# Altium PCB ECS.PcbDoc (part 1 of 2)
Units mil, origin at the board's own origin, x right, y up, seen from the top; angles counter-clockwise.
Board outline 7693.03 x 5708.02 mil, 4 copper layers (Top Layer, Groud, Power, Bottom Layer); 237 components, 184 nets, 882 pads, 605 vias.
Unrouted connection lines stored in the file: 304.
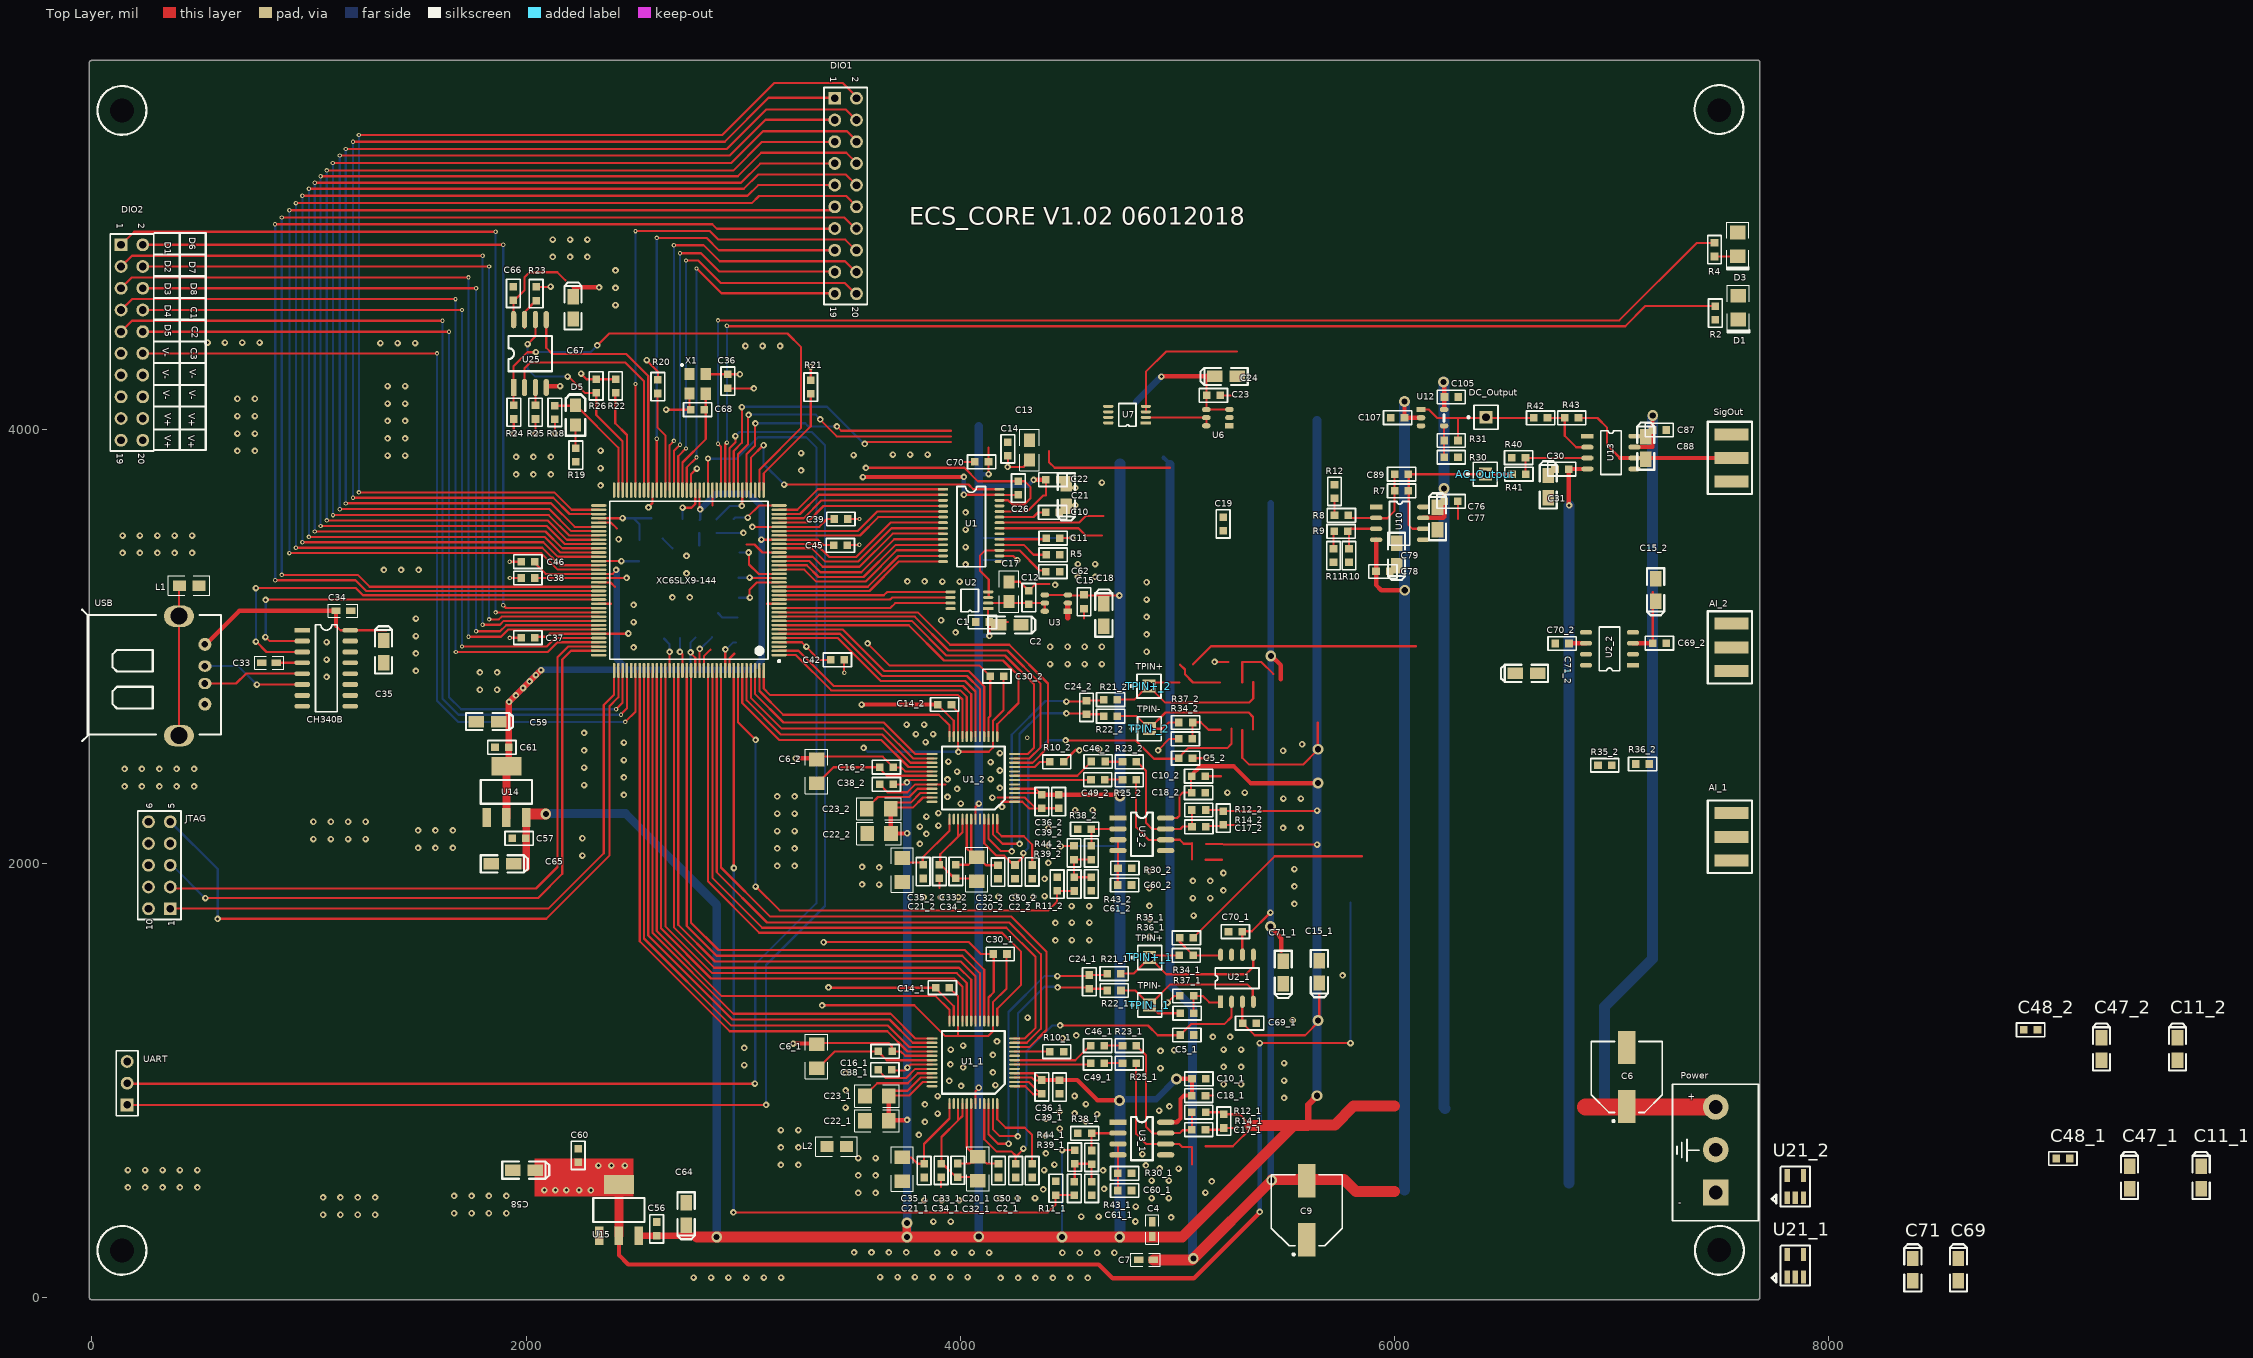
[diagram p0: Top Layer view]
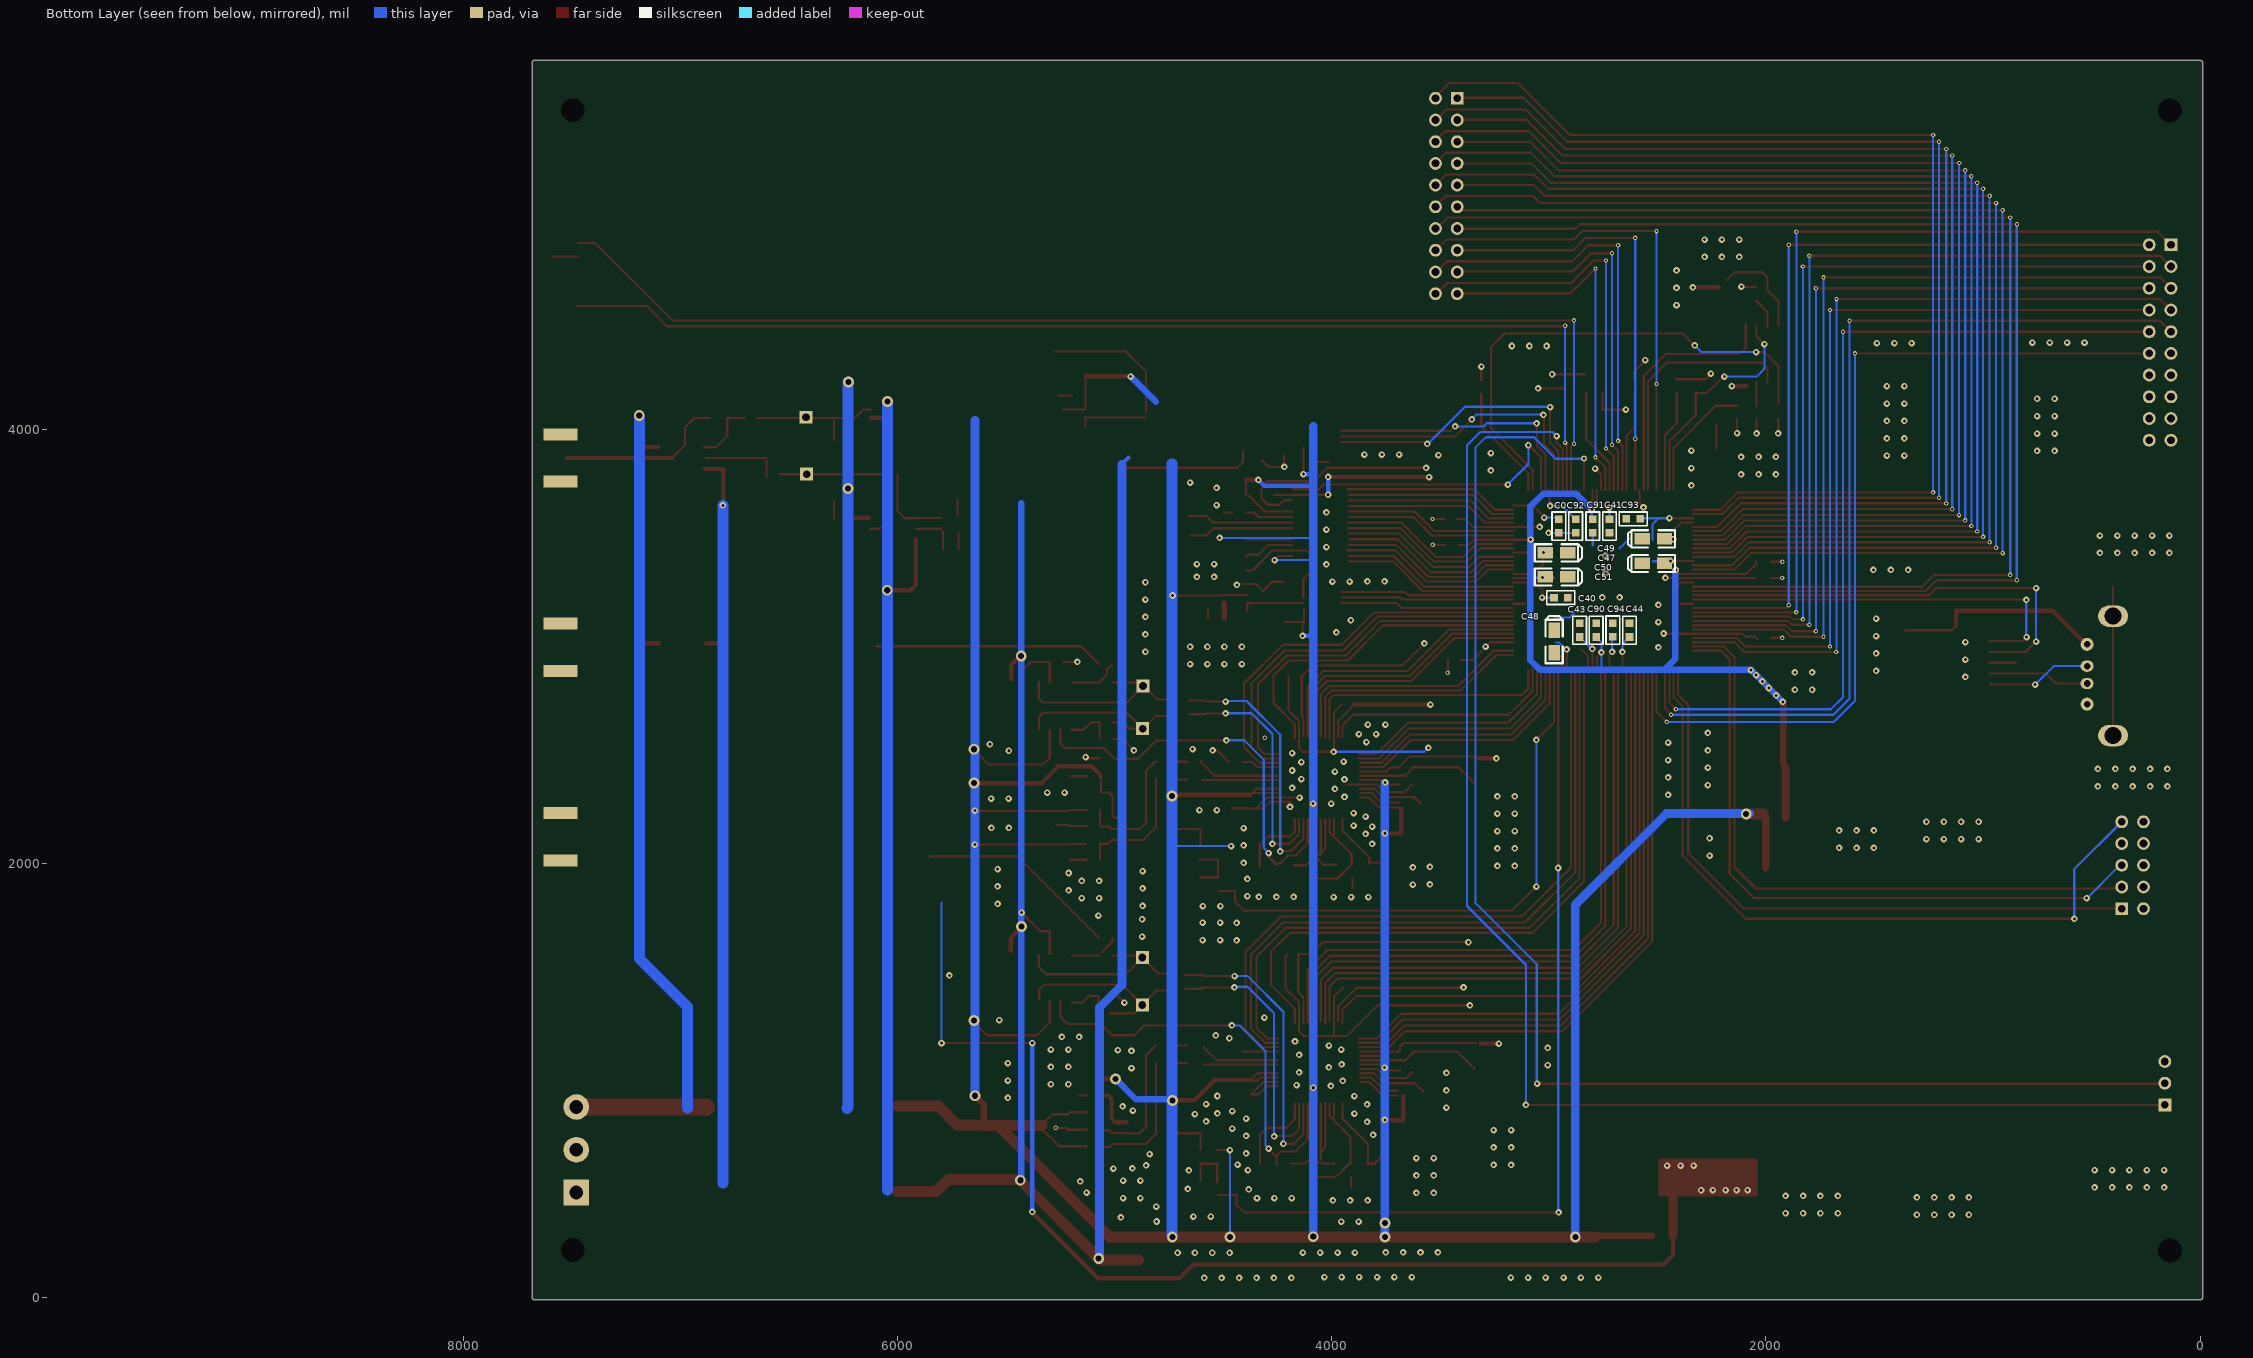
[diagram p1: Bottom Layer view, seen from below]
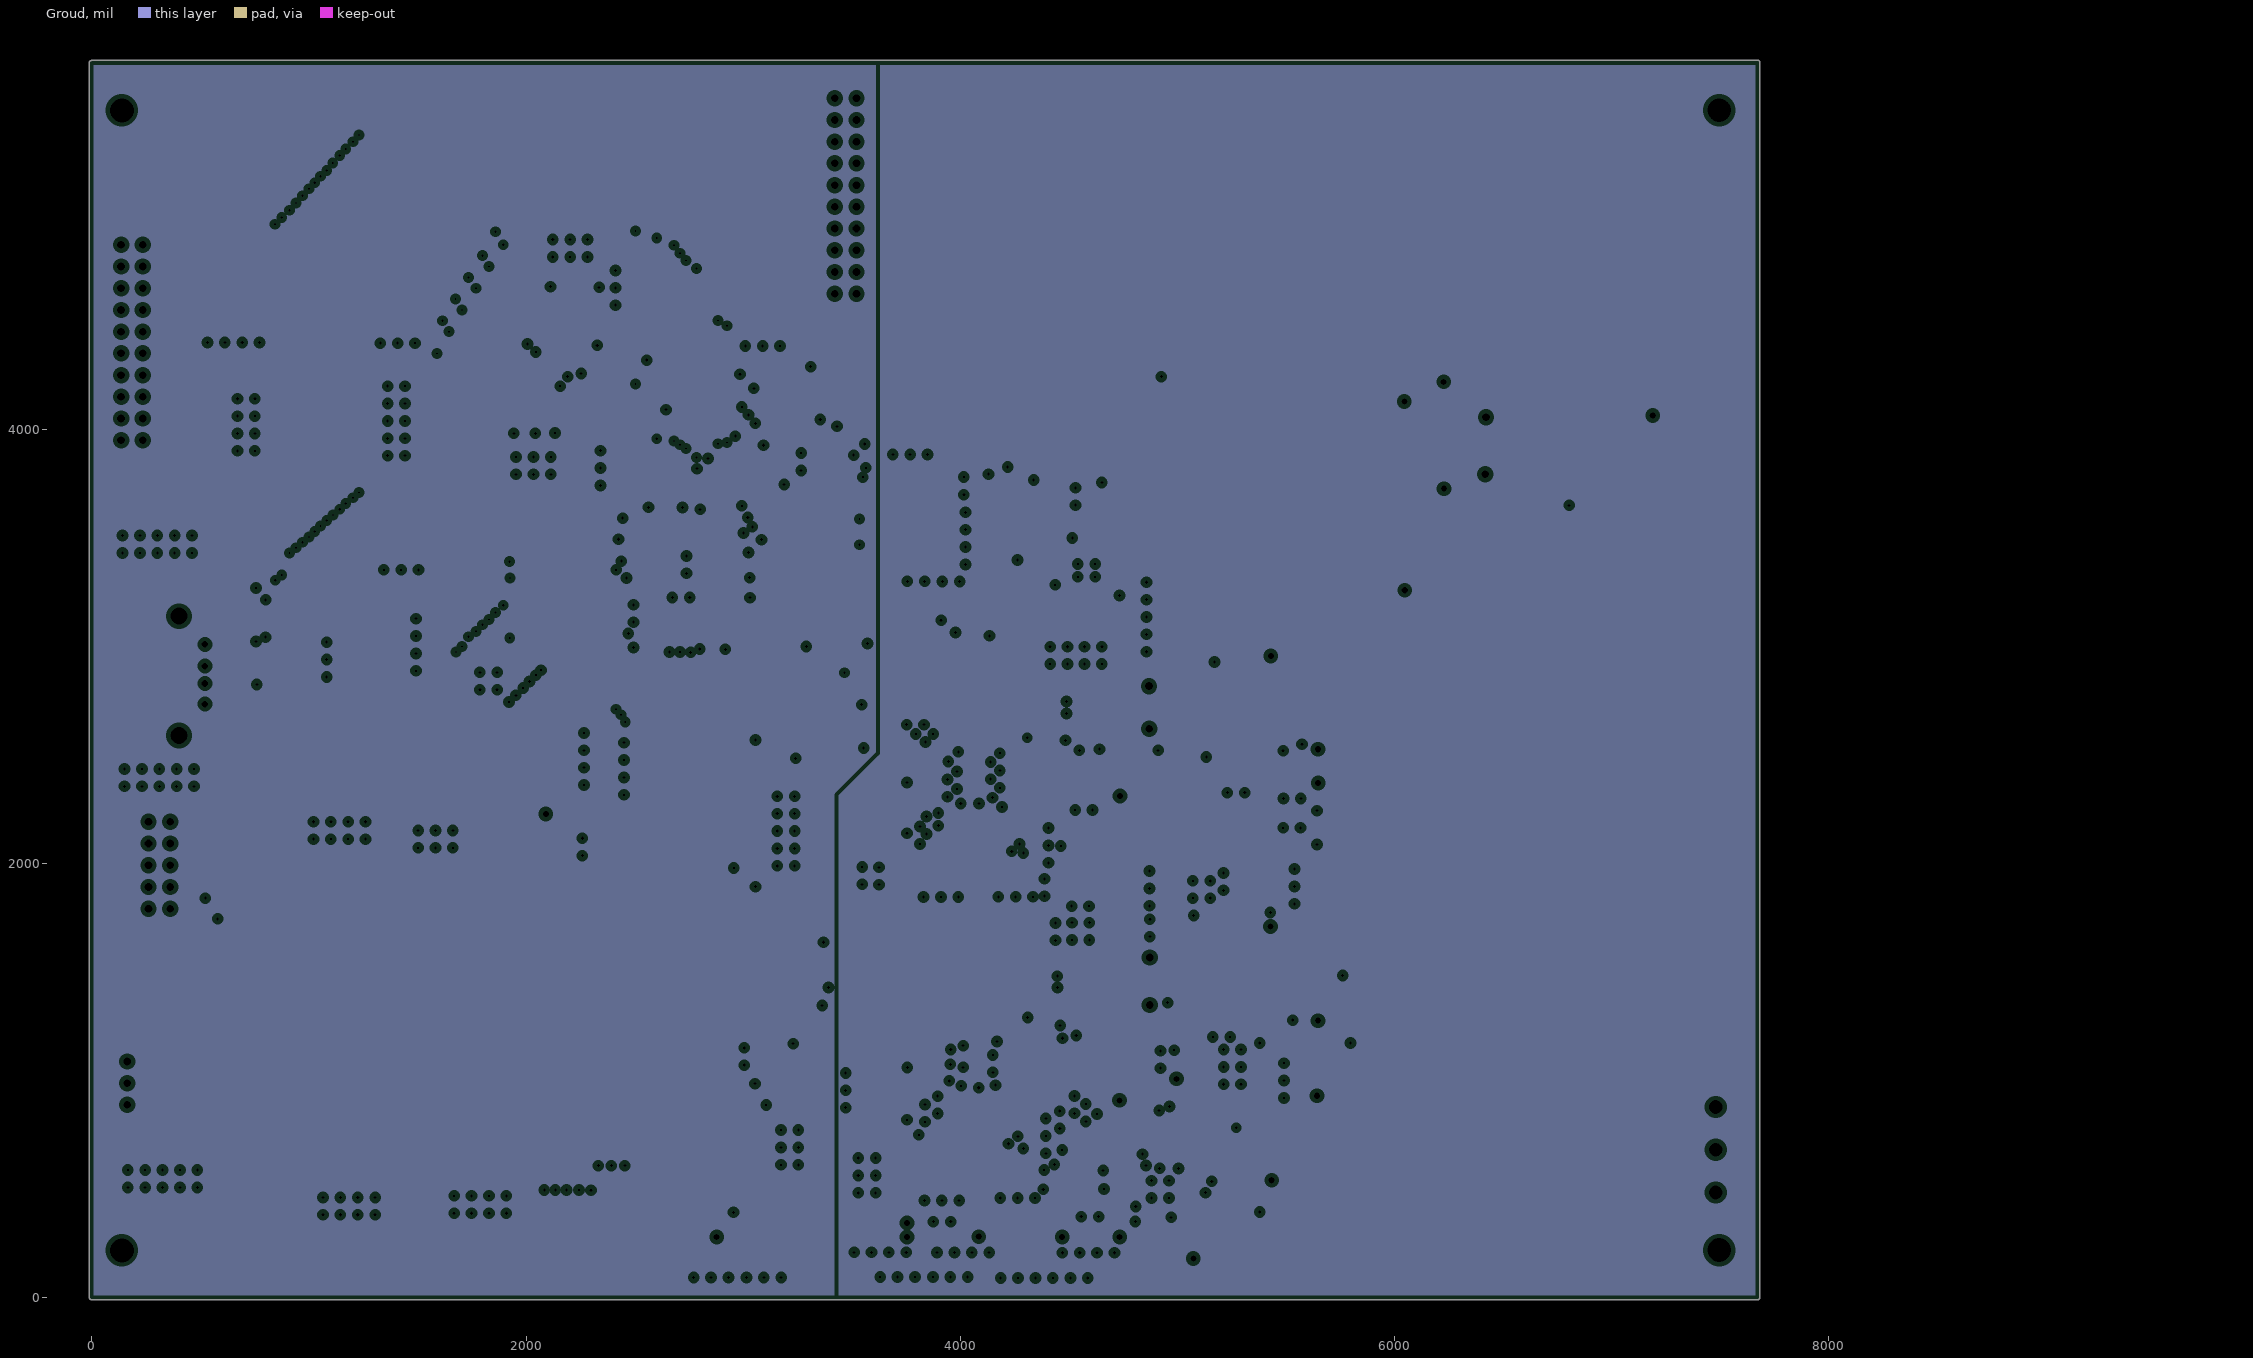
[diagram p2: Groud, clearances drawn from the general rule]
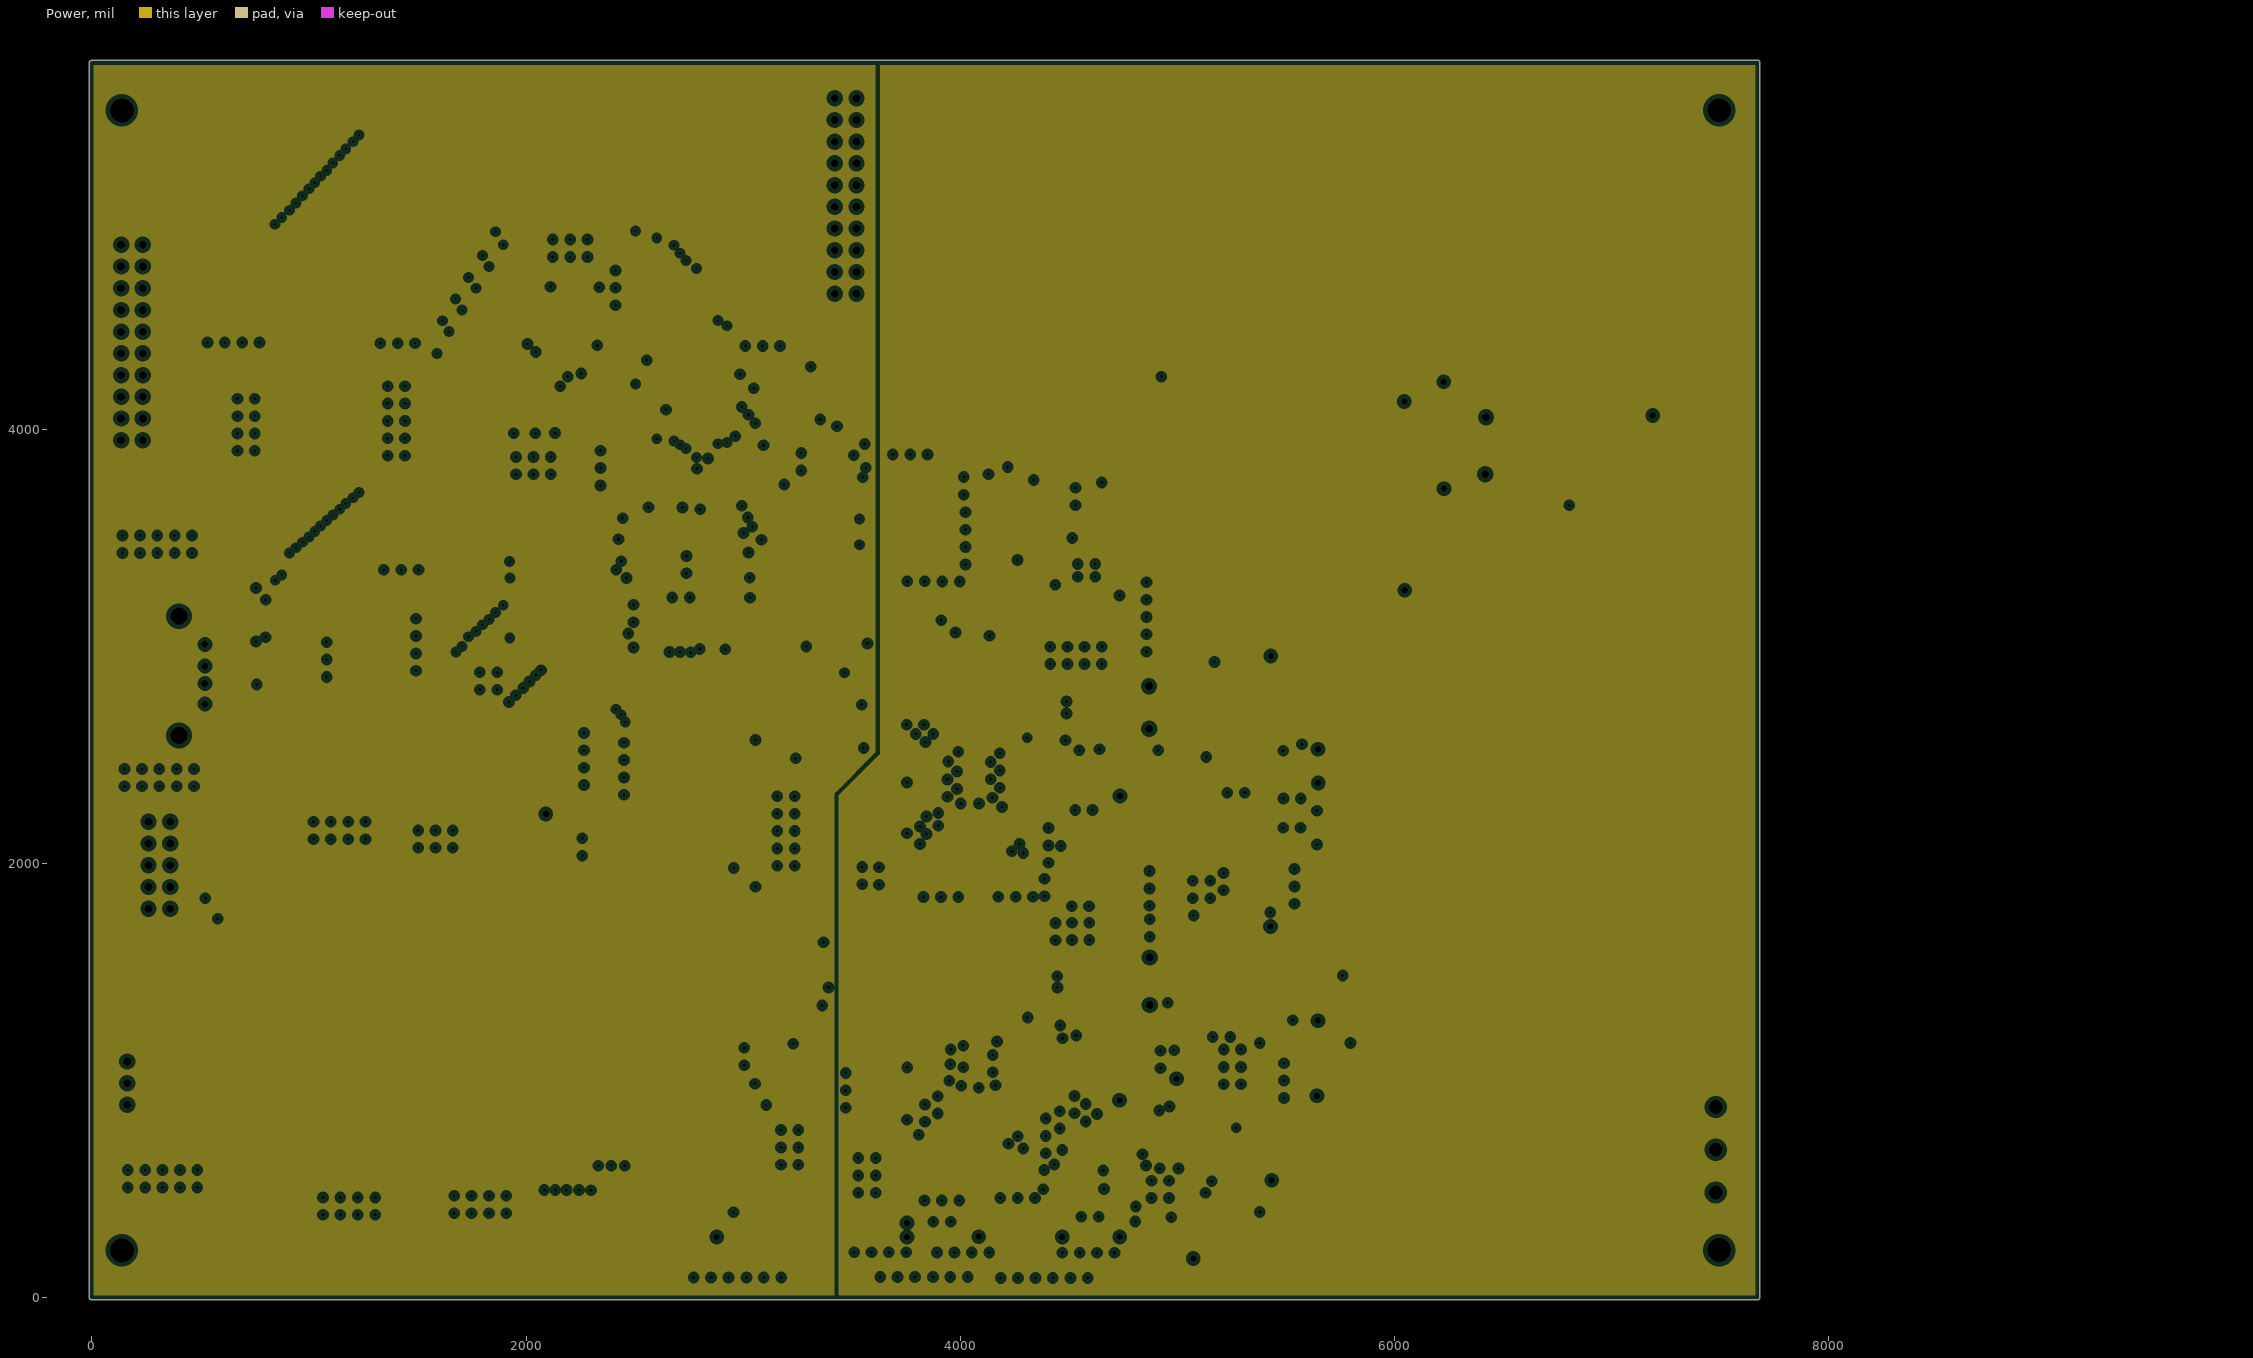
[diagram p3: Power, clearances drawn from the general rule]

## Layer stack, top to bottom
Top Solder: solder mask 0.4, Solder Resist, Dk 3.5
Top Layer: signal copper 1.4
Dielectric1: core 12.6, FR-4, Dk 4.8
Groud: plane copper 1.4
Dielectric2: prepreg 12.6, FR-4, Dk 4.8
Power: plane copper 1.4
Dielectric3: core 12.6, FR-4, Dk 4.8
Bottom Layer: signal copper 1.4
Bottom Solder: solder mask 0.4, Solder Resist, Dk 3.5

## Board outline
-11.02,2 ccw(c-1,2) -1,-8.01 7672,-8.01 ccw(c7672,2) 7682.01,2 ccw(c7672,2) 7682,2.5 ccw(c7672,3) 7682.01,3 7682.01,5690 ccw(c7672,5690) 7667.64,5699.02 -1,5699.02 ccw(c-1,5689) -11.02,5689

## Design rules (kind name [scope] priority, off if disabled: settings)
Clearance [All] p1: gap=3
ComponentClearance [All] p1: gap=0 collisioncheckmode=3 verticalgap=0 showdistances=FALSE
HoleSize [All] p1: absolutevalues=TRUE maxlimit=500 minlimit=1 maxpercent=80.000 minpercent=20.000
MinimumSolderMaskSliver [All] p1: minsoldermaskwidth=2
PlaneClearance [All] p1: clearance=20
PlaneConnect [All] p1: planeconnectstyle=Relief reliefexpansion=20 reliefentries=4 reliefconductorwidth=10 reliefairgap=10
PolygonConnect PolygonConnect_1 [IsVia] p1: connectstyle=Direct reliefconductorwidth=10 reliefentries=4 polygonreliefangle="90 Angle" airgapwidth=10
PolygonConnect [All] p2: connectstyle=Relief reliefconductorwidth=10 reliefentries=4 polygonreliefangle="90 Angle" airgapwidth=10
RoutingVias [All] p1: holewidth=14 width=30 viastyle="Through Hole" minholewidth=14 minwidth=30 maxholewidth=28 maxwidth=50
SilkToSilkClearance [All] p1: silktosilkclearance=0
SilkToSolderMaskClearance SilkscreenOverComponentPads [IsPad] p1: minsilkscreentomaskgap=0 clearancetoexposedcopper=TRUE
SolderMaskExpansion [All] p1: expansion=4
Width [All] p1: maxlimit=100 minlimit=6 preferedwidth=10 minimp=50.000000 maximp=50.000000 favimp=50.000000
23 further rules are at their usual default settings.

## Classes and differential pairs
component class FPGA: AC_Output C0 C1 C2 C4 C6 C7 C9 C10 C11 C12 C13 C14 C15 C17 C18 C19 C21 C22 C23 C24 C26 C30 C31 C33 C34 C35 C36 C37 C38 C39 C40 C41 C42 C43 C44 C45 C46 C47 C48 C49 C50 C51 C56 C57 C58 C59 C60 C61 C62 C64 C65 C66 C67 C68 C69 C70 C71 C76 C77 C78 C79 C87 C88 C89 C90 C91 C92 C93 C94 C105 C107 CH340B D1 D3 D5 DAC904_D1 DC_Output DIO1 DIO2 JP4 JTAG L1 L2 Power R0 R2 R4 R5 R7 R8 R9 R10 R11 R12 R18 R19 R20 R21 R22 R23 R24 R25 R26 R30 R31 R40 R41 R42 R43 SigOut U1 U2 U3 U6 U7 U10 U12 U13 U14 U15 U25 UART USB X1 XC6SLX9-144
channel class AD9244: AD9244A AD9244B
component class AD9244A: AI_1 C2_1 C5_1 C6_1 C10_1 C11_1 C14_1 C15_1 C16_1 C17_1 C18_1 C20_1 C21_1 C22_1 C23_1 C24_1 C30_1 C32_1 C33_1 C34_1 C35_1 C36_1 C38_1 C39_1 C46_1 C47_1 C48_1 C49_1 C50_1 C60_1 C61_1 C69_1 C70_1 C71_1 R10_1 R11_1 R12_1 R14_1 R21_1 R22_1 R23_1 R25_1 R30_1 R34_1 R35_1 R36_1 R37_1 R38_1 R39_1 R43_1 R44_1 TPIN+_1 TPIN-_1 U1_1 U2_1 U3_1 U21_1
component class AD9244B: AI_2 C2_2 C5_2 C6_2 C10_2 C11_2 C14_2 C15_2 C16_2 C17_2 C18_2 C20_2 C21_2 C22_2 C23_2 C24_2 C30_2 C32_2 C33_2 C34_2 C35_2 C36_2 C38_2 C39_2 C46_2 C47_2 C48_2 C49_2 C50_2 C60_2 C61_2 C69_2 C70_2 C71_2 R10_2 R11_2 R12_2 R14_2 R21_2 R22_2 R23_2 R25_2 R30_2 R34_2 R35_2 R36_2 R37_2 R38_2 R39_2 R43_2 R44_2 TPIN+_2 TPIN-_2 U1_2 U2_2 U3_2 U21_2

## Components (designator, comment, footprint, x,y, rotation, side; value= is the part's Value field where it differs from the comment)
AC_Output "OutDir" PIN1 6418,3794 r90 top
AI_1 "SMA" SMA_SMT 7551,2127 r90 top (schematic designator AI)
AI_2 "SMA" SMA_SMT 7551,2999.5 r90 top (schematic designator AI)
C0 "100nF" 0603#1 2958,3616 r180 bottom
C1 "100nF" 0603#1 4163,3117 r270 top
C2 "10uF" 3216 4228,3098 r0 top
C2_1 "100nF" 0603#1 4335,525 r180 top (schematic designator C2)
C2_2 "100nF" 0603#1 4335,1901 r180 top (schematic designator C2)
C4 "100nF" 0603#2 4884,283 r90 top
C5_1 "100nF" 0603#1 5105,1215 r270 top (schematic designator C5)
C5_2 "100nF" 0603#1 5099,2490 r270 top (schematic designator C5)
C6 "47uF" cap_pol_8*10.2 7069,1017 r90 top
C6_1 "10uF_pol" 1206 3338,1168 r270 top (schematic designator C6)
C6_2 "10uF_pol" 1206 3338,2480 r270 top (schematic designator C6)
C7 "100nF" 0603#2 4821,176 r0 top
C9 "47uF" cap_pol_8*10.2 5596,403 r90 top
C10 "100nF" 0603#1 4486,3622 r270 top
C10_1 "100nF" 0603#1 5160,1013 r270 top (schematic designator C10)
C10_2 "100nF" 0603#1 5158,2407 r270 top (schematic designator C10)
C11 "100nF" 0603#1 4366,3495 r90 top
C11_1 "10uF" 3216 9716,555 r90 top (schematic designator C11)
C11_2 "10uF" 3216 9607,1147 r90 top (schematic designator C11)
C12 "100nF" 0603#1 4320,3164 r180 top
C13 "10uF" 0805 4319,3860 r90 top
C14 "100nF" 0603#1 4215,3971 r0 top (schematic designator C12)
C14_1 "100nF" 0603#1 3979,1433 r270 top (schematic designator C14)
C14_2 "100nF" 0603#1 3989,2737 r270 top (schematic designator C14)
C15 "100nF" 0603#1 4574,3145 r180 top
C15_1 "10uF" 3216 5652,1502 r270 top (schematic designator C15)
C15_2 "10uF" 3216 7201,3261 r270 top (schematic designator C15)
C16_1 "100nF" 0603#1 3593,1131 r90 top (schematic designator C16)
C16_2 "100nF" 0603#1 3599,2440 r90 top (schematic designator C16)
C17 "100nF" 0805 4224,3298 r270 top
C17_1 "100nF" 0603#1 5218,753 r180 top (schematic designator C17)
C17_2 "100nF" 0603#1 5216,2149 r180 top (schematic designator C17)
C18 "10uF" 3216 4662,3145 r90 top
C18_1 "1nF" 0603#1 5159,936 r270 top (schematic designator C18)
C18_2 "1nF" 0603#1 5158,2331 r270 top (schematic designator C18)
C19 "20pF" 0603#1 5206,3626 r0 top
C20_1 "10uF_pol" 1206 4081,650 r270 top (schematic designator C20)
C20_2 "10uF_pol" 1206 4076,2029 r270 top (schematic designator C20)
C21 "10uF" 3216 4487,3698 r270 top
C21_1 "10uF_pol" 1206 3732,648 r270 top (schematic designator C21)
C21_2 "10uF_pol" 1206 3732,2026 r270 top (schematic designator C21)
C22 "100nF" 0603#1 4487,3773 r270 top
C22_1 "10uF_pol" 1206 3671,816 r180 top (schematic designator C22)
C22_2 "10uF_pol" 1206 3681,2139 r180 top (schematic designator C22)
C23 "100nF" 0603#1 5227,4161 r270 top (schematic designator C12)
C23_1 "10uF_pol" 1206 3671,930 r180 top (schematic designator C23)
C23_2 "10uF_pol" 1206 3680,2253 r180 top (schematic designator C23)
C24 "10uF" 3216 5224,4245 r180 top
C24_1 "22pF" 0603#1 4590,1517 r0 top (schematic designator C24)
C24_2 "22pF" 0603#1 4576.75,2780.76 r0 top (schematic designator C24)
C26 "100nF" 0603#1 4263,3791 r0 top
C30 "100nF" 0603#1 6709,3813 r90 top
C30_1 "100nF" 0603#1 4245,1588 r270 top (schematic designator C30)
C30_2 "100nF" 0603#1 4230,2868 r270 top (schematic designator C30)
C31 "10uF" 3216 6709,3736 r90 top
C32_1 "100nF" 0603#1 4180,525 r180 top (schematic designator C32)
C32_2 "100nF" 0603#1 4178,1900 r180 top (schematic designator C32)
C33 "100nF" 0603#2 850,2925 r180 top
C33_1 "100nF" 0603#1 3984,649 r0 top (schematic designator C33)
C33_2 "100nF" 0603#1 3975,2025 r0 top (schematic designator C33)
C34 "100nF" 0603#2 1125,3165 r0 top
C34_1 "100nF" 0603#1 3916,526 r180 top (schematic designator C34)
C34_2 "100nF" 0603#1 3908,1903 r180 top (schematic designator C34)
C35 "10uF" 3216 1345,2976 r90 top
C35_1 "100nF" 0603#1 3838,525 r180 top (schematic designator C35)
C35_2 "100nF" 0603#1 3833,1902 r180 top (schematic designator C35)
C36 "100nF" 0603#1 2925,4283 r0 top (schematic designator C31)
C36_1 "100nF" 0603#1 4461,910 r180 top (schematic designator C36)
C36_2 "100nF" 0603#1 4380,2225 r180 top (schematic designator C36)
C37 "100nF" 0603#1 2070,3045 r270 top
C38 "100nF" 0603#1 2070,3320 r270 top
C38_1 "100nF" 0603#1 3592,1047 r90 top (schematic designator C38)
C38_2 "100nF" 0603#1 3599,2361 r90 top (schematic designator C38)
C39 "100nF" 0603#1 3389,3583 r90 top
C39_1 "100nF" 0603#1 4380,911 r180 top (schematic designator C39)
C39_2 "100nF" 0603#1 4457,2225 r180 top (schematic designator C39)
C40 "100nF" 0603#1 3006,3221 r90 bottom
C41 "100nF" 0603#1 2725,3616 r180 bottom
C42 "100nF" 0603#1 3373,2934 r90 top
C43 "100nF" 0603#1 2854,3014 r0 bottom
C44 "100nF" 0603#1 2624,3014 r0 bottom
C45 "100nF" 0603#1 3387,3462 r90 top
C46 "100nF" 0603#1 2070,3395 r270 top
C46_1 "100nF" 0603#1 4571,1158 r90 top (schematic designator C46)
C46_2 "100nF" 0603#1 4574,2466 r90 top (schematic designator C46)
C47 "22uF" 3216 2519,3384 r0 bottom (schematic designator C32)
C47_1 "10uF" 3216 9386,555 r90 top (schematic designator C47)
C47_2 "10uF" 3216 9257,1147 r90 top (schematic designator C47)
C48 "22uF" 3216 2974,3023 r90 bottom (schematic designator C32)
C48_1 "100nF" 0603#1 9017,638 r90 top (schematic designator C48)
C48_2 "100nF" 0603#1 8868,1230 r90 top (schematic designator C48)
C49 "22uF" 3216 2519,3497 r0 bottom (schematic designator C32)
C49_1 "100nF" 0603#1 4571,1077 r90 top (schematic designator C49)
C49_2 "100nF" 0603#1 4572,2383 r90 top (schematic designator C49)
C50 "22uF" 3216 2965,3430 r180 bottom (schematic designator C32)
C50_1 "100nF" 0603#1 4259,525 r180 top (schematic designator C50)
C50_2 "100nF" 0603#1 4256,1901 r180 top (schematic designator C50)
C51 "22uF" 3216 2965,3319 r180 bottom (schematic designator C32)
C56 "100nF" 0603#1 2606,257 r180 top (schematic designator C12)
C57 "100nF" 0603#1 2029,2121 r270 top (schematic designator C12)
C58 "10uF" 3216 1990,587 r0 top
C59 "10uF" 3216 1823,2653 r0 top (schematic designator C12)
C60 "100nF" 0603#1 2244,595 r180 top
C60_1 "10nF" 0603#1 4818,499 r270 top (schematic designator C60)
C60_2 "10nF" 0603#1 4818,1906 r270 top (schematic designator C60)
C61 "22nF" 0603#1 1950,2540 r270 top
C61_1 "100nF" 0603#1 4521,565 r0 top (schematic designator C61)
C61_2 "100nF" 0603#1 4520,1967 r0 top (schematic designator C61)
C62 "100nF" 0603#1 4487,3349 r270 top
C64 "10uF" 3216 2736,387 r270 top (schematic designator C3)
C65 "10uF" 3216 1891,1998 r0 top (schematic designator C3)
C66 "100nF" 0603#1 1946,4565 r180 top (schematic designator C12)
C67 "10uF" 3216 2218,4560 r90 top (schematic designator C3)
C68 "100nF" 0603#1 2851,4095 r270 top
C69 "10uF" 3216 8598,130 r90 top
C69_1 "100nF" 0603#1 5271,1261 r90 top (schematic designator C69)
C69_2 "100nF" 0603#1 7159,3011 r90 top (schematic designator C69)
C70 "100nF" 0603#1 4037,3846 r90 top (schematic designator C12)
C70_1 "100nF" 0603#1 5328,1691 r270 top (schematic designator C70)
C70_2 "100nF" 0603#1 6833,3018 r270 top (schematic designator C70)
C71 "10uF" 3216 8388,130 r90 top
C71_1 "10uF" 3216 5486,1499 r270 top (schematic designator C71)
C71_2 "10uF" 3216 6607,2878 r180 top (schematic designator C71)
C76 "100nF" 0603#1 6199,3664 r90 top (schematic designator C12)
C77 "10uF" 3216 6199,3589 r90 top (schematic designator C12)
C78 "100nF" 0603#1 6007,3350 r270 top (schematic designator C12)
C79 "10uF" 3216 6008,3424 r270 top (schematic designator C12)
C87 "100nF" 0603#1 7158,3993 r90 top (schematic designator C12)
C88 "10uF" 3216 7158,3914 r90 top (schematic designator C12)
C89 "NULL" 0603#1 6093,3798 r270 top (schematic designator C12)
C90 "100nF" 0603#1 2778,3014 r0 bottom
C91 "100nF" 0603#1 2802,3616 r180 bottom
C92 "100nF" 0603#1 2881,3616 r180 bottom
C93 "100nF" 0603#1 2550,3592 r270 bottom
C94 "100nF" 0603#1 2701,3015 r0 bottom
C105 "100nF" 0603#1 6200,4145 r90 top (schematic designator C12)
C107 "100nF" 0603#1 5953,4050 r90 top (schematic designator C12)
CH340B "Comment" PCBComponent_1 1085,2915 r270 top
D1 "LED3" 1206_LED 7586,4563 r270 top
D3 "LED3" 1206_LED 7583,4854 r270 top
D5 "LED3" 0805_pol1 2217,4062 r270 top (schematic designator D1)
DC_Output "OutDir" PIN1 6421,4056 r90 top
DIO1 "Header 10X2" HDR2X10 3422,5525 r270 top
DIO2 "Header 10X2" HDR2X10 135,4850 r270 top
JTAG "JTAG 2*5p 2.00mm 180 degree" JTAG_2.54_2x5 310,1992 r0 top
L1 "10nH" 0805 403,3280 r0 top (schematic designator C18)
L2 "10nH" 0805 3475,698 r180 top
Power "Power" PWR_3T 8020,904 r180 top
R2 "2.2K" 0603#1 7473,4597 r0 top
R4 "2.2K" 0603#1 7469,4889 r0 top
R5 "4.7K" 0603#1 4366,3418 r90 top
R7 "402" 0603#1 6093,3721 r270 top
R8 "200" 0603#1 5816,3608 r270 top
R9 "200" 0603#1 5815,3535 r270 top
R10 "402" 0603#1 5786,3480 r0 top (schematic designator R35)
R10_1 "1k" 0603#1 4383,1130 r90 top (schematic designator R10)
R10_2 "1k" 0603#1 4383,2465 r90 top (schematic designator R10)
R11 "26.1" 0603#1 5723,3358 r180 top
R11_1 "49.9" 0603#1 4444,444 r180 top (schematic designator R11)
R11_2 "49.9" 0603#1 4450,1845 r180 top (schematic designator R11)
R12 "28.7" 0603#1 5719,3775 r0 top
R12_1 "113K" 0603#1 5037,851 r90 top (schematic designator R12)
R12_2 "113K" 0603#1 5037,2243 r90 top (schematic designator R12)
R14_1 "90K" 0603#1 5159,779 r270 top (schematic designator R14)
R14_2 "90K" 0603#1 5160,2174 r270 top (schematic designator R14)
R18 "2.2K" 0603#1 2137,4017 r180 top (schematic designator R2)
R19 "22R" 0603#1 2234,3821 r180 top (schematic designator R2)
R20 "2.2K" 0603#1 2603,4258 r0 top
R21 "2.2K" 0603#1 3307,4256 r0 top (schematic designator R2)
R21_1 "49.9" 0603#1 4769,1498 r270 top (schematic designator R21)
R21_2 "49.9" 0603#1 4752.75,2759.76 r270 top (schematic designator R21)
R22 "2.2K" 0603#1 2408,4261 r0 top (schematic designator R2)
R22_1 "49.9" 0603#1 4770,1420 r270 top (schematic designator R22)
R22_2 "49.9" 0603#1 4752.75,2683.76 r270 top (schematic designator R22)
R23 "2.2K" 0603#1 2042,4686 r0 top
R23_1 "33" 0603#1 4717,1158 r90 top (schematic designator R23)
R23_2 "33" 0603#1 4717,2465 r90 top (schematic designator R23)
R24 "2.2K" 0603#1 1948,4018 r180 top (schematic designator R2)
R25 "2.2K" 0603#1 2048,4018 r180 top (schematic designator R2)
R25_1 "33" 0603#1 4717,1077 r90 top (schematic designator R25)
R25_2 "33" 0603#1 4717,2382 r90 top (schematic designator R25)
R26 "2.2K" 0603#1 2319,4261 r0 top (schematic designator R2)
R30 "10K" 0603#1 6322,3876 r270 top (schematic designator R3)
R30_1 "10k" 0603#1 4818,578 r270 top (schematic designator R30)
R30_2 "10k" 0603#1 4819,1984 r270 top (schematic designator R30)
R31 "10K" 0603#1 6322,3953 r270 top (schematic designator R3)
R34_1 "499" 0603#1 5104,1395 r270 top (schematic designator R34)
R34_2 "499" 0603#1 5098,2579 r270 top (schematic designator R34)
R35_1 "499" 0603#1 4980,1654 r90 top (schematic designator R35)
R35_2 "499" 0603#1 6907,2449 r90 top (schematic designator R35)
R36_1 "499" 0603#1 5101.75,1582 r270 top (schematic designator R36)
R36_2 "499" 0603#1 7203,2463 r270 top (schematic designator R36)
R37_1 "499" 0603#1 4983,1307 r90 top (schematic designator R37)
R37_2 "499" 0603#1 4977,2646 r90 top (schematic designator R37)
R38_1 "10k" 0603#1 4512,754 r90 top (schematic designator R38)
R38_2 "10k" 0603#1 4511,2155 r90 top (schematic designator R38)
R39_1 "49。9" 0603#1 4609,586 r180 top (schematic designator R39)
R39_2 "49。9" 0603#1 4608,1989 r180 top (schematic designator R39)
R40 "10k" 0603#1 6510,3866 r90 top
R41 "10k" 0603#1 6634,3798 r270 top
R42 "10k" 0603#1 6734,4057 r270 top
R43 "10k" 0603#1 6877,4057 r270 top
R43_1 "7.87k" 0603#1 4601,565 r0 top (schematic designator R43)
R43_2 "7.87k" 0603#1 4599,1968 r0 top (schematic designator R43)
R44_1 "1.86k" 0603#1 4531,588 r180 top (schematic designator R44)
R44_2 "1.86k" 0603#1 4528,1989 r180 top (schematic designator R44)
SigOut "SMA" SMA_SMT 7551,3872 r90 top
TPIN+_1 "TPIN+" PIN1 4872,1568 r90 top (schematic designator TPIN+)
TPIN+_2 "TPIN+" PIN1 4868.75,2817.76 r90 top (schematic designator TPIN+)
TPIN-_1 "TPIN-" PIN1 4872,1349 r90 top (schematic designator TPIN-)
TPIN-_2 "TPIN-" PIN1 4870.75,2621.76 r90 top (schematic designator TPIN-)
U1 "DAC904" TSSOP-28 3919,3726 r0 top
U1_1 "AD9244" "Quad48 - duplicate1" 4250,975 r180 top (schematic designator U1)
U1_2 "AD9244" "Quad48 - duplicate1" 4250,2285 r180 top (schematic designator U1)
U2 "DAC8551" VSSOP-8 4044,3209 r180 top
U2_1 "AD8138" SO-8N 5198.75,1364 r90 top (schematic designator U2)
U2_2 "AD8138" SO-8N 7098,2914 r180 top (schematic designator U2)
U3 "ADR3412" SOT23-6 4448,3202 r90 top
U3_1 "MC10EL16D" SO-8 4726,809 r0 top (schematic designator U3)
U3_2 "MC10EL16D" SO-8 4726,2210 r0 top (schematic designator U3)
U6 "ADR3425" SOT23-6 5192,4056 r90 top (schematic designator U3)
U7 "DAC8551" VSSOP-8 4770,4064 r180 top (schematic designator U2)
U10 "AD8065" SO-8N 5915,3643 r0 top (schematic designator U3)
U12 "ADA4000-1AUJZ" SOT-23-5 6169,4052 r270 top (schematic designator U5)
U13 "AD8065" SO-8N 6888,3969 r0 top
U14 "AMS1117-1.2" SOT-223 1901,2329 r270 top
U15 "AMS1117-3.3" SOT-223 2419,403 r270 top
U21_1 "AD8601" SOT23-5 7808,97 r0 top (schematic designator U21)
U21_2 "AD8601" SOT23-5 7808,461 r0 top (schematic designator U21)
U25 "W25Q64" SO-8M 1943,4193 r90 top
UART "Header 3" HDR1X3 163,889 r90 top
USB "USB-TapyA" USB_A 338,2835 r180 top
X1 "XTAL_Soured" XTAL3225 2828,4255 r270 top
XC6SLX9-144 "XC6SLX9-2TQG144C" TQG144_N 2750,3305 r180 top

## Footprints (in the part's own frame and the unit in brackets; to place one, negate y for a bottom-side part, rotate by r counter-clockwise, add the part's x,y. Pads: shape width x height; smd on the part's side, far side on the other; paste and mask are expansions set on the pad)
0603#1 [mil]
  rect 35x35 smd: 1(4.25,-92.76) 2(4.25,-29.76)
  silkscreen extent -27,-126 36,4
0603#2 [mil]
  rect 43.31x31.5 smd: 1(0,0) 2(66.93,0)
  silkscreen extent -35,-30 100,30
0805 [mil]
  rect 60x50 smd: 1(90,0) 2(0,0)
  silkscreen extent -50,-45 140,45
0805_pol1 [mil]
  rect 60x50 smd: 1(-49.13,10.94) 2(40.87,10.94)
  silkscreen extent -98,-34 91,56
1206 [mm]
  rect 1.6x1.8 smd: 1(0,0) 2(2.8,0)
  silkscreen extent -1.2,-1.3 4,1.3
1206_LED [mm]
  rect 1.6x1.8 smd: 1(-1.344,-0.081) 2(1.456,-0.081)
  silkscreen extent -2.54,-1.38 2.98,1.22
3216 [mm]
  rect 1.8x1.35 smd: 1(1.312,0.032) 2(-1.308,0.032)
  silkscreen extent -2.54,-0.97 2.97,1.03, body extent -1.7,-0.81 1.7,0.87, height 1.71
cap_pol_8*10.2 [mm]
  rect 3.9x2.05 smd: 1(-3.443,-0.001) 2(3.457,-0.001)
  silkscreen extent -5.27,-4.15 4.16,4.15
HDR1X3 [mm] "Connector; Header; 3 Position"
  rect 1.5x1.5 hole 0.9: 1(0,0)
  round 1.5 hole 0.9: 2(2.54,0) 3(5.08,0)
  silkscreen extent -1.27,-1.27 6.35,1.27
HDR2X10 [mm] "Connector; Header; 10x2 Position"
  rect 1.5x1.5 hole 0.9: 1(0,0)
  round 1.5 hole 0.9: 2(0,2.54) 3(2.54,0) 4(2.54,2.54) 5(5.08,0) 6(5.08,2.54) 7(7.62,0) 8(7.62,2.54) 9(10.16,0) 10(10.16,2.54) 11(12.7,0) 12(12.7,2.54) 13(15.24,0) 14(15.24,2.54) 15(17.78,0) 16(17.78,2.54) 17(20.32,0) 18(20.32,2.54) 19(22.86,0) 20(22.86,2.54)
  silkscreen extent -1.27,-1.27 24.13,3.81
JTAG_2.54_2x5 [mm]
  rect 1.5x1.5 hole 0.9: 1(1.307,-5.062)
  round 1.5 hole 0.9: 2(1.307,-2.522) 3(1.307,0.018) 4(1.307,2.558) 5(1.307,5.098) 6(-1.233,5.098) 7(-1.233,2.558) 8(-1.233,0.018) 9(-1.233,-2.522) 10(-1.233,-5.062)
  silkscreen extent -2.5,-6.33 2.58,6.37
PCBComponent_1 [mil]
  rect 22x72 smd: 1(-160,-115)
  oct 22x72 smd: 2(-110,-115) 3(-60,-115) 4(-10,-115) 5(40,-115) 6(90,-115) 7(140,-115) 8(190,-115) 9(190,105) 10(140,105) 11(90,105) 12(40,105) 13(-10,105) 14(-60,105) 15(-110,105) 16(-160,105)
  silkscreen extent -185,-55 215,45
PIN1 [mm] "Connector; Plug"
  rect 1.5x1.5 hole 0.9: 1(0,0)
  silkscreen extent -1.4,-1.4 1.4,2.17
PWR_3T [mm]
  rect 3x3 hole 1.6: 1(13.747,10.628)
  round 3 hole 1.6: 2(13.747,5.628) 3(13.747,0.628)
  silkscreen extent 8.74,-2.05 18.8,13.93
"Quad48 - duplicate1" [mil]
  oval 50x10 smd: 1(0,0) 2(0,-20) 3(0,-40) 4(0,-60) 5(0,-80) 6(0,-100) 7(0,-120) 8(0,-140) 9(0,-160) 10(0,-180) 11(0,-200) 12(0,-220) 25(380,-220) 26(380,-200) 27(380,-180) 28(380,-160) 29(380,-140) 30(380,-120) 31(380,-100) 32(380,-80) 33(380,-60) 34(380,-40) 35(380,-20) 36(380,0)
  oval 10x50 smd: 13(80,-300) 14(100,-300) 15(120,-300) 16(140,-300) 17(160,-300) 18(180,-300) 19(200,-300) 20(220,-300) 21(240,-300) 22(260,-300) 23(280,-300) 24(300,-300) 37(300,80) 38(280,80) 39(260,80) 40(240,80) 41(220,80) 42(200,80) 43(180,80) 44(160,80) 45(140,80) 46(120,80) 47(100,80) 48(80,80)
  silkscreen extent 45,-255 335,35
SMA_SMT [mm]
  rect 1.4x4 smd: 1(-0.095,0) 2(-2.87,0) 2(2.68,0)
  rect 1.4x4 smd far side: 2(-2.87,0) 2(2.68,0)
  silkscreen extent -4.32,-2.42 4.15,2.77
SO-8 [mil]
  rect 80x24 smd: 1(0,0)
  oval 80x24 smd: 2(0,-50) 3(0,-100) 4(0,-150) 5(220,-150) 6(220,-100) 7(220,-50) 8(220,0)
  silkscreen extent 60,-175 160,25
SO-8M [mil]
  rect 80x24 smd: 1(0,0)
  oval 80x24 smd: 2(0,-50) 3(0,-100) 4(0,-150) 5(312.6,-150) 6(312.6,-100) 7(312.6,-50) 8(312.6,0)
  silkscreen extent 74,-176 237,24
SO-8N [mm]
  rect 1.44x0.55 smd: 1(0,0)
  oval 1.44x0.55 smd: 2(0,-1.28) 3(0,-2.56) 4(0,-3.84) 5(5.5,-3.84) 6(5.5,-2.56) 7(5.5,-1.28) 8(5.5,0)
  silkscreen extent 1.55,-4.48 3.95,0.64
SOT23-5 [mm]
  rect 0.62x1.5 smd: 1(0,0) 2(0.95,0) 3(1.9,0) 4(1.9,2.62) 5(0,2.62)
  silkscreen extent -1.78,-1.02 2.67,3.68
SOT23-6 [mm]
  rect 0.6x1 smd: 1(-0.998,-1.204)
  oval 0.6x1 smd: 2(-0.048,-1.204) 3(0.902,-1.204) 4(0.902,1.496) 5(-0.048,1.496) 6(-0.998,1.496)
  body extent -1.5,-1.3 1.4,1.5, height 1.2
SOT-23-5 [mm]
  rect 0.6x1 smd: 1(-0.995,-1.201)
  oval 0.6x1 smd: 2(-0.045,-1.201) 3(0.905,-1.201) 4(0.905,1.499) 5(-0.995,1.499)
  silkscreen extent -0.4,1.5 0.4,1.5, body extent -1.5,-1.3 1.4,1.5, height 1.2
SOT-223 [mm]
  rect 2.2x1 smd: 1(2.951,-2.075) 2(2.951,0.225) 3(2.951,2.525)
  rect 2.2x3.5 smd: 2(-3.049,0.225)
  silkscreen extent -1.45,-2.77 1.35,3.23
TQG144_N [mm] "Thin QFP, 144-Leads, Body 20x20mm, Pitch 0.5mm, IPC Medium Density"
  oval 1.8x0.3 smd: 1(-10.55,8.75) 2(-10.55,8.25) 3(-10.55,7.75) 4(-10.55,7.25) 5(-10.55,6.75) 6(-10.55,6.25) 7(-10.55,5.75) 8(-10.55,5.25) 9(-10.55,4.75) 10(-10.55,4.25) 11(-10.55,3.75) 12(-10.55,3.25) 13(-10.55,2.75) 14(-10.55,2.25) 15(-10.55,1.75) 16(-10.55,1.25) 17(-10.55,0.75) 18(-10.55,0.25) 19(-10.55,-0.25) 20(-10.55,-0.75) 21(-10.55,-1.25) 22(-10.55,-1.75) 23(-10.55,-2.25) 24(-10.55,-2.75) 25(-10.55,-3.25) 26(-10.55,-3.75) 27(-10.55,-4.25) 28(-10.55,-4.75) 29(-10.55,-5.25) 30(-10.55,-5.75) 31(-10.55,-6.25) 32(-10.55,-6.75) 33(-10.55,-7.25) 34(-10.55,-7.75) 35(-10.55,-8.25) 36(-10.55,-8.75) 73(10.55,-8.75) 74(10.55,-8.25) 75(10.55,-7.75) 76(10.55,-7.25) 77(10.55,-6.75) 78(10.55,-6.25) 79(10.55,-5.75) 80(10.55,-5.25) 81(10.55,-4.75) 82(10.55,-4.25) 83(10.55,-3.75) 84(10.55,-3.25) 85(10.55,-2.75) 86(10.55,-2.25) 87(10.55,-1.75) 88(10.55,-1.25) 89(10.55,-0.75) 90(10.55,-0.25) 91(10.55,0.25) 92(10.55,0.75) 93(10.55,1.25) 94(10.55,1.75) 95(10.55,2.25) 96(10.55,2.75) 97(10.55,3.25) 98(10.55,3.75) 99(10.55,4.25) 100(10.55,4.75) 101(10.55,5.25) 102(10.55,5.75) 103(10.55,6.25) 104(10.55,6.75) 105(10.55,7.25) 106(10.55,7.75) 107(10.55,8.25) 108(10.55,8.75)
  oval 0.3x1.8 smd: 37(-8.75,-10.55) 38(-8.25,-10.55) 39(-7.75,-10.55) 40(-7.25,-10.55) 41(-6.75,-10.55) 42(-6.25,-10.55) 43(-5.75,-10.55) 44(-5.25,-10.55) 45(-4.75,-10.55) 46(-4.25,-10.55) 47(-3.75,-10.55) 48(-3.25,-10.55) 49(-2.75,-10.55) 50(-2.25,-10.55) 51(-1.75,-10.55) 52(-1.25,-10.55) 53(-0.75,-10.55) 54(-0.25,-10.55) 55(0.25,-10.55) 56(0.75,-10.55) 57(1.25,-10.55) 58(1.75,-10.55) 59(2.25,-10.55) 60(2.75,-10.55) 61(3.25,-10.55) 62(3.75,-10.55) 63(4.25,-10.55) 64(4.75,-10.55) 65(5.25,-10.55) 66(5.75,-10.55) 67(6.25,-10.55) 68(6.75,-10.55) 69(7.25,-10.55) 70(7.75,-10.55) 71(8.25,-10.55) 72(8.75,-10.55) 109(8.75,10.55) 110(8.25,10.55) 111(7.75,10.55) 112(7.25,10.55) 113(6.75,10.55) 114(6.25,10.55) 115(5.75,10.55) 116(5.25,10.55) 117(4.75,10.55) 118(4.25,10.55) 119(3.75,10.55) 120(3.25,10.55) 121(2.75,10.55) 122(2.25,10.55) 123(1.75,10.55) 124(1.25,10.55) 125(0.75,10.55) 126(0.25,10.55) 127(-0.25,10.55) 128(-0.75,10.55) 129(-1.25,10.55) 130(-1.75,10.55) 131(-2.25,10.55) 132(-2.75,10.55) 133(-3.25,10.55) 134(-3.75,10.55) 135(-4.25,10.55) 136(-4.75,10.55) 137(-5.25,10.55) 138(-5.75,10.55) 139(-6.25,10.55) 140(-6.75,10.55) 141(-7.25,10.55) 142(-7.75,10.55) 143(-8.25,10.55) 144(-8.75,10.55)
  silkscreen extent -10.68,-9.25 9.25,9.57, body extent -10,-10 10,10, height 1.6
TSSOP-28 [mil]
  rect 45x12.99 smd: 1(1.63,-1.8)
  oval 45x12.99 smd: 2(1.63,-27.39) 3(1.63,-52.98) 4(1.63,-78.57) 5(1.63,-104.16) 6(1.63,-129.75) 7(1.63,-155.34) 8(1.63,-180.93) 9(1.63,-206.52) 10(1.63,-232.11) 11(1.63,-257.7) 12(1.63,-283.29) 13(1.63,-308.88) 14(1.63,-334.47) 15(261.47,-334.47) 16(261.47,-308.88) 17(261.47,-283.29) 18(261.47,-257.7) 19(261.47,-232.11) 20(261.47,-206.52) 21(261.47,-180.93) 22(261.47,-155.34) 23(261.47,-129.75) 24(261.47,-104.16) 25(261.47,-78.57) 26(261.47,-52.98) 27(261.47,-27.39) 28(261.47,-1.8)
  silkscreen extent 66,-358 197,11
USB_A [mil]
  round 60 hole 30: 1(-183.21,-174.68) 4(-183.21,100.32)
  oval 60x52.13 hole 30: 2(-183.21,-74.68) 3(-183.21,5.32)
  oval 137.79x98.42 hole 78.74: 5(-63.21,245.32) 6(-63.21,-304.68)
  silkscreen extent -258,-335 382,270
VSSOP-8 [mm]
  rect 1.2x0.35 smd: 1(-2.149,0.874)
  oval 1.2x0.35 smd: 2(-2.149,0.224) 3(-2.149,-0.426) 4(-2.149,-1.076) 5(2.251,-1.076) 6(2.251,-0.426) 7(2.251,0.224) 8(2.251,0.874)
  silkscreen extent -1.01,-1.4 1.03,1.26
XTAL3225 [mm]
  rect 1.4x1.2 smd: 1(0,-1.9) 2(2.3,-1.9) 4(0,0)
  rect 1.5x1.2 smd: 3(2.3,0)
  silkscreen extent -1.16,-2.9 -0.96,-2.7

## Part data
AC_Output DC_Output TPIN+_1 TPIN+_2 TPIN-_1 TPIN-_2: library part Socket, "Socket"
AI_1 AI_2 SigOut: library part BNC, "BNC Elbow Connector"
C0 C36 C37 C38 C39 C40 C41 C42 C43 C44 C45 C46 C56 C57 C60 C61 C66 C68 C90 C91 C92 C93 C94: library part Cap, "Capacitor"
C1 C2_1 C2_2 C4 C5_1 C5_2 C7 C10 C10_1 C10_2 C11 C12 C13 C14 C14_1 C14_2 C15 C16_1 C16_2 C17 C17_1 C17_2 C18_1 C18_2 C19 C22 C23 C24_1 C24_2 C26 C30 C30_1 C30_2 C32_1 C32_2 C33 C33_1 C33_2 C34 C34_1 C34_2 C35_1 C35_2 C36_1 C36_2 C38_1 C38_2 C39_1 C39_2 C46_1 C46_2 C48_1 C48_2 C49_1 C49_2 C50_1 C50_2 C60_1 C60_2 C61_1 C61_2 C62 C69_1 C69_2 C70 C70_1 C70_2 C76 C78 C87 C89 C105 C107: library part "Cap Semi", "Capacitor (Semiconductor SIM Model)"
C2 C11_1 C11_2 C15_1 C15_2 C18 C21 C24 C31 C35 C47_1 C47_2 C58 C59 C64 C65 C67 C69 C71 C71_1 C71_2 C77 C79 C88: library part "Cap Pol2", "Polarized Capacitor (Axial)"
C6 C6_1 C6_2 C9 C20_1 C20_2 C21_1 C21_2 C22_1 C22_2 C23_1 C23_2 C47 C48 C49 C50 C51: library part "Cap Pol3", "Polarized Capacitor (Surface Mount)"
CH340B: library part CH340G, "USB to TTL Serial / UART"
D1 D3 D5: "Typical BLUE SiC LED"
DIO1 DIO2: "Header, 10-Pin, Dual row"
JTAG: library part FPGA_JTAG
L1 L2: library part Inductor, "Inductor"
Power: library part "Header 3", "Header, 3-Pin"
R2 R4 R5 R7 R8 R9 R10 R10_1 R10_2 R11 R11_1 R11_2 R12 R12_1 R12_2 R14_1 R14_2 R18 R19 R20 R21 R21_1 R21_2 R22 R22_1 R22_2 R23 R23_1 R23_2 R24 R25 R25_1 R25_2 R26 R30 R30_1 R30_2 R31 R34_1 R34_2 R35_1 R35_2 R36_1 R36_2 R37_1 R37_2 R38_1 R38_2 R39_1 R39_2 R40 R41 R42 R43 R43_1 R43_2 R44_1 R44_2: library part Res1, "Resistor"
U1: library part DAC90X
U1_1 U1_2: library part DSx4
U2 U7: library part AD5680
U3 U6: library part ADR34xx
U10 U13: "High Speed JFET Input Amplifier"
U12: library part AD8601, "Precision CMOS, Single Supply, Rail to Rail, Windband Operational Amplifiers"
U14 U15: library part AMS1117
U21_1 U21_2: "Precision CMOS, Single Supply, Rail to Rail, Windband Operational Amplifiers"
U25: library part W25X16
UART: "Header, 3-Pin"
XC6SLX9-144: "Spartan-6 LX 1.2V FPGA, 102 User I/Os, 144-Pin TQFP (0.5mm Pitch), Speed Grade 2, Commercial Grade, Pb-Free"

## Free pads (board coordinates)
  round 50 hole 110: 1(139,5469) 1(7495,220) 1(7495,5470) 2(139,219)

## Via types
v1: diameter 30, hole 14, Top Layer to Bottom Layer, 507 vias
v2: diameter 20, hole 10, Top Layer to Bottom Layer, 74 vias
v3: diameter 50, hole 28, Top Layer to Bottom Layer, 23 vias
v4: diameter 28, hole 14, Top Layer to Bottom Layer, 1 vias

## Nets (pads, with @x,y where several pads share a name; then routed paths per layer and width w, separated by ;. In a path a pad name is that pad's centre, name@x,y a point inside that pad or via, vN(x,y) a via of type N, cw(c..) or ccw(c..) an arc to the next point about the centre after c; other vN are vias at no path point)
1V2: C45.2 C46.2 C51.1 C59.1 C61.2 C90.2 C91.2 U14.2 XC6SLX9-144.19 XC6SLX9-144.28 XC6SLX9-144.52 XC6SLX9-144.89 XC6SLX9-144.128 | length 4851.8
  Top Layer w10: C46.2@2045.24,3390.75 2045.24,3379.76 2090.47,3334.53 XC6SLX9-144.89@2334.65,3334.53 2399.53,3334.53 v1@2415,3350 ; v1@2754,2970 2758,2970 2779.53,2948.47 XC6SLX9-144.128@2779.53,2889.65 ; v1@2799.21,3631.79 XC6SLX9-144.52@2799.21,3720.35 ; v1@3035,3314.84 XC6SLX9-144.19@3165.35,3314.84 ; v1(3084,3492) XC6SLX9-144.28@3165.35,3492.01 3344.99,3492.01 3370,3467 C45.2@3414,3467
  Top Layer w30: U14.2@1920.15,2461 1920.15,2743.15 v1@2067.5,2890.5
  Top Layer w35: U14.2@1909.87,2212.8 U14.2@1909.87,2441.87
  Bottom Layer w10: 2758,2891 2758,2892 v1(2758,2973) 2758,3019 C90.2@2780,3041 ; C91.2@2800,3583 2802,3585 v1@2802,3631 ; 2980,3317 v1(3030,3317) 3080,3317
  Bottom Layer w30: v1@1924.5,2748.5 2068,2892 2469,2892 ; v1@2417,3352 2417,2944 2469,2892 ; v1@2802,3631 2875,3704 3026,3704 3085,3645 3085,2937 3040,2892 2758,2892 2469,2892
  other v1: 1922,2745 1953,2775 1987,2809 2016,2839 2045,2868 2069,2891 2415,3353 2802,3632
3V3: C0.2 C6_1.1 C6_2.1 C14_1.1 C14_2.1 C16_1.1 C16_2.1 C26.1 C30_1.1 C30_2.1 C36.2 C37.2 C38.2 C39.2 C40.2 C41.2 C42.2 C43.2 C44.2 C47.1 C48.1 C49.1 C50.1 C58.1 C60.2 C66.2 C67.1 C69.1 C92.2 C93.2 C94.2 D1.1 D3.1 DIO2.17 DIO2.18 DIO2.19 DIO2.20 JTAG.9 R18.2 R21.2 R22.2 R23.2 R24.2 R25.2 R26.2 U1.27 U1_1.15 U1_1.23 U1_1.29 U1_2.15 U1_2.23 U1_2.29 U15.2 U25.8 X1.4 XC6SLX9-144.4 XC6SLX9-144.18 XC6SLX9-144.20 XC6SLX9-144.31 XC6SLX9-144.36 XC6SLX9-144.42 XC6SLX9-144.53 XC6SLX9-144.63 XC6SLX9-144.76 XC6SLX9-144.86 XC6SLX9-144.90 XC6SLX9-144.103 XC6SLX9-144.122 XC6SLX9-144.125 XC6SLX9-144.129 XC6SLX9-144.135 | length 15701.4
  Top Layer w10: U25.8@1943,4477.92 1943,4591 1993,4641 1993,4701 2016,4724 2144,4724 2181,4687 ; v1@1943.75,3979.25 R24.2@1943.75,4047.76 ; C37.2@2040.24,3035.75 2049.49,3045 2095,3045 2108.94,3058.94 XC6SLX9-144.103@2334.65,3058.94 v1@2467,3058.94 ; v1@2043.75,3985.75 R25.2@2043.75,4047.76 ; C38.2@2046.14,3314.84 XC6SLX9-144.90@2334.65,3314.84 v1@2466.84,3314.84 ; R23.2@2046.25,4656.24 v1@2107.24,4656.24 ; v1@2132.75,3988.75 R18.2@2132.75,4046.76 ; v1@2255,4255 2278.76,4231.24 R26.2@2323.25,4231.24 R22.2@2412.25,4231.24 R22.2@2415.24,4231.24 ; XC6SLX9-144.86@2334.65,3393.58 v1@2429.42,3393.58 ; XC6SLX9-144.76@2334.65,3590.43 v1@2443,3590.43 ; v1@2565,3643 2582.68,3660.68 XC6SLX9-144.63@2582.68,3720.35 ; XC6SLX9-144.122@2661.42,2889.65 v1@2661.42,2972.42 ; v1(2709,2975) 2720.47,2963.53 XC6SLX9-144.125@2720.47,2889.65 ; v1@2722,3634 2727,3639 2762,3639 2779.53,3656.53 XC6SLX9-144.53@2779.53,3720.35 ; XC6SLX9-144.129@2799.21,2889.65 v1@2799.21,2974.79 ; X1.4@2833,4254.24 v1@2980,4254.24 ; XC6SLX9-144.135@2917.32,2889.65 v1@2917.32,2987 ; v1@2996.06,3654 XC6SLX9-144.42@2996.06,3720.35 ; v1@3024,3589 3024,3600 3073.49,3649.49 XC6SLX9-144.36@3165.35,3649.49 ; v1@3027,3443 3027,3378 3070.47,3334.53 XC6SLX9-144.20@3165.35,3334.53 ; v1@3029,3223 3029,3262 3062.16,3295.16 XC6SLX9-144.18@3165.35,3295.16 ; v1@3038,3551.06 XC6SLX9-144.31@3165.35,3551.06 3350.06,3551.06 3386,3587 C39.2@3422,3587 ; XC6SLX9-144.4@3165.35,3019.57 3269.43,3019.57 3351,2938 C42.2@3403,2938 ; R21.2@3311.25,4226.24 v1@3311.25,4291.25 ; C6_1.1@3339,1174 3670,1174 3685.76,1158.24 C16_1.1@3685.76,1135.25 ; C6_2.1@3340,2493 3643.01,2493 C16_2.1@3691.76,2444.25 ; v1@3368,1639 4039,1639 4094.25,1583.75 C30_1.1@4152.24,1583.75 ; v1@3386,1428.75 C14_1.1@3886.24,1428.75 ; v1@3574,3013 3675,2912 4088.99,2912 C30_2.1@4137.24,2863.75 ; C16_1.1@3692,1135 3726,1135 3746,1115 U1_1.29@3870,1115 ; C16_2.1@3694,2443 3728,2443 3746,2425 U1_2.29@3870,2425 ; C14_1.1@3889,1424 3970,1343 U1_1.23@3970,1275 ; C14_2.1@3908,2720 3970,2658 U1_2.23@3970,2585 ; v1@4015,3698.61 U1.27@4180.47,3698.61 ; U1_1.15@4130,1267 U1_1.15@4130,1275 4130,1384 4154.25,1408.25 C30_1.1@4154.25,1579 ; U1_2.15@4130,2585 4130,2672 4138,2680 C30_2.1@4138,2866 ; U1.27@4177,3698 C26.1@4265,3698 ; v1(5379,1174) v1@5806,1174
  Top Layer w20: 2219.63,4654.91 v1@2339.91,4654.91 ; U15.2@2427.87,286.8 2427.87,197.13 2471,154 4638,154 4702,90 5075,90 v1@5379,394 ; v1@3232,1172 C6_1.1@3314,1172 ; v1@3244,2486 C6_2.1@3326,2486 ; v1@3545.25,2732.75 C14_2.1@3896.24,2732.75 ; v1@3551,3781 v1(4016,3781)
  Top Layer w40: U15.2@2427.87,286.8 U15.2@2427.87,486.13
  Bottom Layer w10: v1(2439,3393) 2521,3393 ; v1(2445,3591) 2495,3591 ; 2522,3492 2522,3564 2495,3591 ; C93.2@2577,3591 2495,3591 ; C44.2@2635,3037 2661,3011 v1(2661,2975) ; v1(2709,2975) C94.2@2709,3040 ; C41.2@2721,3588 v1(2721,3640) ; v1@2802.5,2988.5 2857,3043 C43.2@2857,3044 ; C92.2@2876.75,3586.24 2937.51,3647 v1@2995,3647 ; v1@2912.5,2977.5 2954,3019 2967,3019 ; C0.2@2957,3587 2964,3594 v1(3021,3594) ; C40.2@2982,3224.25 v1@3031,3224.25 ; 2983,3433 v1(3025,3433) ; v1(5797,1174) 5797,1820
  Bottom Layer w20: v1(4016,3699) v1@4016,3780 ; v1(5379,396) v1(5379,1174) v1@5379,1175
  other v1: 2299,496 2084,497 2135,497 2186,497 2244,497 2333,609 2393,609 2455,609 3230,1171 3393,1430 3370,1638 3242,2485 3546,2732 2918,2987 2800,2989 3291,3000 3573,3014 2471,3060 3031,3225 2463,3316 3042,3551 2564,3641 2994,3648 3551,3780 1944,3982 2043,3982 2133,3983 2985,4254 2254,4257 3311,4289 2337,4654 2113,4657
+5V: C1.2 C2.1 C4.1 C6.1 C10_1.1 C10_2.1 C11.1 C11_1.1 C11_2.1 C15.1 C15_1.1 C15_2.1 C17_1.1 C17_2.1 C18.1 C18_1.1 C18_2.1 C21.1 C22.1 C22_1.1 C22_2.1 C23.1 C23_1.1 C23_2.1 C24.1 C36_1.1 C36_2.1 C38_1.1 C38_2.1 C39_1.1 C39_2.1 C47_1.1 C47_2.1 C48_1.2 C48_2.2 C56.2 C57.2 C64.1 C65.1 C69_1.2 C69_2.2 C70.1 C71.1 C76.2 C77.1 C87.2 C88.1 C105.2 Power.3 R12_1.1 R12_2.1 R44_1.1 R44_2.1 U1.16 U1.24 U1_1.3 U1_1.4 U1_1.31 U1_1.34 U1_1.35 U1_1.43 U1_2.3 U1_2.4 U1_2.31 U1_2.34 U1_2.35 U1_2.43 U2.1 U2_1.3 U2_2.3 U3.3 U3.4 U3_1.8 U3_2.8 U6.3 U6.4 U7.1 U10.7 U12.5 U13.7 U14.3 U15.3 U21_1.5 U21_2.5 | length 38392.7
  Top Layer w10: C38_1.1@3684,1048 3745,1048 3772,1075 U1_1.31@3870,1075 ; C23_2.1@3689,2281 3772,2281 3816,2325 U1_2.34@3870,2325 ; C38_2.1@3689,2365 3744,2365 3764,2385 U1_2.31@3870,2385 ; C23_2.1@3691,2258 3781,2258 3828,2305 U1_2.35@3870,2305 ; C23_1.1@3696,954 3757,954 3818,1015 U1_1.34@3870,1015 ; C23_1.1@3698,932 3765,932 3828,995 U1_1.35@3870,995 ; v3(3754,280) v3@3754,281 ; U1_1.43@4070,895 4070,952 v1@4082,964 ; U1_2.43@4070,2205 4070,2261 v1(4086,2277) ; C1.2@4127,3112.75 U2.1@4127,3173 ; C70.1@4129.61,3849.39 4129.61,3916.57 ; v1@4129.76,3798.24 C70.1@4129.76,3850.25 ; C1.2@4133.24,3112.75 4220.25,3112.75 ; v1(4134,3049) C1.2@4134,3112 ; U1.16@4180.47,3417.12 4243.88,3417.12 v1(4263,3398) ; U1.24@4181,3622 4309,3622 4383.24,3696.24 4394.24,3696.24 C22.1@4394.24,3768.75 ; U1_1.3@4250,1015 4329,1015 4343,1001 C39_1.1@4366,1001 ; U1_1.4@4250,1035 4342,1035 C39_1.1@4366,1011 ; U1_2.3@4250,2325 C36_2.1@4364,2325 ; U1_2.4@4250,2345 4348,2345 C36_2.1@4375,2318 ; U3.4@4389.1,3237.51 U3.3@4495.4,3237.51 ; C11.1@4458.76,3499.25 v1@4509.75,3499.25 ; v1@4459.76,2081.76 R44_2.1@4523.75,2081.76 ; v1@4469.24,680.76 R44_1.1@4526.75,680.76 ; U3.3@4503.4,3235.51 v1@4732,3235.51 ; U3_2.8@4946,2210 4998,2210 5010,2222 5010,2313 5025,2328 5062,2328 C10_2.1@5062,2400 ; R12_1.1@5129.76,855.25 C17_1.1@5207.75,855.25 ; R12_2.1@5129.76,2247.25 C17_2.1@5204.75,2247.25 ; 5130.76,698.25 5255.25,698.25 5343,786 ; 5132.76,2090.25 5206.25,2090.25 ; 5133.1,4252.9 U6.4@5133.1,4091.51 U6.3@5236.51,4091.51 ; C17_2.1@5211.75,2241.76 v1@5640.24,2241.76 ; 5212.75,2087.76 v1@5639,2087.76 ; C17_1.1@5213.75,845.76 5286.24,845.76 5336,796 ; U2_1.3@5298.75,1364 5298.75,1266.75 5355.5,1210 5588,1210 5653,1275 5653,1397 ; 5298.75,2615.76 5298.75,2487.25 5330,2456 5578,2456 5646,2524 5646,2649 ; 6224.39,3592.61 6228,3596.21 ; C69_2.2@7188.76,3015.25 7188.76,3250.76
  Top Layer w20: C23_1.1@3671,930 3671,819 v1@3749,819 ; C22_2.1@3680,2139 C23_2.1@3680,2253 ; C22_2.1@3681,2139 v1@3747,2139 ; v1@4336.25,3768.75 C22.1@4394.24,3768.75 ; C39_1.1@4375.75,1003.76 4538.24,1003.76 4631,911 v3@4738,911 ; C36_2.1@4375.75,2317.76 C39_2.1@4452.75,2317.76 v3@4732,2317.76 ; v1@4928,4244.63 5131.09,4244.63 ; U3_1.8@4946,809 4997,809 5014,826 5014,916 5030,932 C18_1.1@5064,932 ; v3@4996.25,1008.75 C10_1.1@5067.24,1008.75 C18_1.1@5067.24,934.24 ; C10_2.1@5065.24,2402.75 5065.24,2408.24 5105,2448 5260,2448 5337,2371 v3@5645,2371 ; U10.7@6131.53,3592.61 6224.39,3592.61 ; 6228,3596.21 v3@6228,3727 ; U12.5@6228.02,4091.17 v3@6228.02,4218 ; U2_2.3@7098,3014.79 C69_2.2@7191.79,3014.79 ; U13.7@7104.53,3918.61 7182.61,3918.61 ; 7187.76,3918.61 C87.2@7187.76,3997.25 v3@7187.76,4062
  Top Layer w30: U15.3@2523.09,287.09 2794.37,287.09 ; 5602,828 5602,890 v3(5643,931)
  Top Layer w35: 2000.42,1981.43 U14.3@2000.42,2212.8
  Top Layer w40: v3@3754,281 v3@3754,349
  Top Layer w50: U14.3@2013,2229 v3(2091,2229) ; 2788,281 v3(2878,281) 3754,281 v3(4469,281) v3(4734,281) 5022,281 5535.46,794.46 ; 5334.46,794.46 5599.05,794.46 ; 5595,797 5725,797 5811.28,883.28 5999.79,883.28
  Top Layer w80: 6880.72,879.28 Power.3@7478.79,879.28
  Bottom Layer w10: 4086,3500 v1(4516,3500) ; 4087,3398 v1(4263,3398) ; v1(4463,2081) 4725,2081 ; v3@4469,283 v1(4469,681)
  Bottom Layer w20: 4086,3741 4312,3741 v1(4338,3767) ; 4086,3794 v1(4130,3794) ; 4087,3050 v1@4135,3050
  Bottom Layer w30: v3@4735,915 4902,915 v3(4996,1009) ; 4810,4128 v1@4925,4243
  Bottom Layer w40: v3@2074,2231 2458,2231 2878,1811 v3(2878,281) ; v3@3755,289 v1(3755,820) v1@3755,2369 ; v3(4085,282) v1(4085,968) 4085,4015 ; v3@5643,929 v1(5643,2088) v1(5643,2244) 5643,4042
  Bottom Layer w50: v3@4735,289 4735,915 4735,3842 ; v3(6226,4219) 6227,4218 6227,878 6232,873 ; 6967,874 6967,1341 7188,1562 v3@7188,4060
  other v1: 3756,1061 3755,2140 3754,2374 4733,3235 4926,4243
  other v3: 3755,345 4733,910 5647,1277 4736,2312 5648,2371 5647,2527 6227,3727 7189,4064
-5V: C7.2 C9.2 C30.1 C31.1 C70_1.2 C70_2.2 C71_1.2 C71_2.2 C78.1 C79.1 C107.1 Power.1 U2_1.6 U2_2.6 U10.4 U12.2 U13.4 | length 16499.6
  Top Layer w10: 5298.24,2928.75 5298.75,2928.75 ; U2_1.6@5298.75,1584 5298.75,1686.25 5301.5,1689 5342,1689 5419,1766 v1@5430,1766 ; 5298.75,2835.76 5298.75,2928.75 ; 5441,2874 5386.25,2928.75 5298.75,2928.75
  Top Layer w20: v3(5429,1710) 5478,1655 5478,1598 ; v3@5432,2958 5476.37,2913.63 5476.37,2849.37 ; U10.4@5915,3491.82 5915,3283 5939,3259 v3@6042,3259 ; v3@6045.77,4115.77 6045.77,4053.77 U12.2@6121.72,4053.77 ; v1@6801.76,3649.24 6801.76,3740.25 C30.1@6801.76,3817.25 ; C30.1@6803.82,3817.82 U13.4@6888,3817.82 ; C70_2.2@6806.21,3014.79 U2_2.6@6881.47,3014.79
  Top Layer w50: C7.2@4890,175 5067,175 v3(5434,542) ; v3@5435,545 5767,545 5822.42,489.58 5999.79,489.58
  Bottom Layer w20: 4936,3870 4966,3840
  Bottom Layer w30: v3@5429,536 v3(5429,1710) 5429,3659
  Bottom Layer w40: 4966,3840 4966,1441 5069,1338 v3@5069,178
  Bottom Layer w50: 6045,497 v3(6045,4129) ; 6804,530 v1(6804,3650)
  other v1: 5428,1775
  other v3: 5073,182 5430,2956 6047,3259
AC_OUTPUT: AC_Output.1 C89.2 R7.2 R41.1 U10.6 | length 782
  Top Layer w10: R7.2@6063,3717.75 6064,3717.75 R7.2@6064,3718 ; U10.6@6127,3542 6082,3542 6065,3559 6065,3793.75 R41.1@6542,3793.75
ADC1_CLK: C61_1.1 R11_1.2 XC6SLX9-144.137 | length 4125
  Top Layer w10: v1(2955,394) 4404,394 4439,429 R11_1.2@4439,476 ; v1@2956.69,1981 XC6SLX9-144.137@2956.69,2889.65 ; R11_1.2@4439.75,473.76 C61_1.1@4523.24,473.76
  Bottom Layer w10: v1@2956,393 2957,394 v1(2957,1980)
ADC1_D1: U1_1.10 XC6SLX9-144.134 | length 3109.8
  Top Layer w10: XC6SLX9-144.134@2897.64,2889.65 2897.64,1982.36 3124,1756 4236,1756 4397,1595 4397,1234 4318,1155 U1_1.10@4248,1155
ADC1_D2: U1_1.11 XC6SLX9-144.133 | length 3073.2
  Top Layer w10: XC6SLX9-144.133@2877.95,2889.65 2877.95,1961.05 3110,1729 4225,1729 4371,1583 4371,1240 4306,1175 U1_1.11@4246,1175
ADC1_D3: U1_1.12 XC6SLX9-144.132 | length 3039.4
  Top Layer w10: XC6SLX9-144.132@2858.27,2889.65 2858.27,1934.73 3088,1705 4212,1705 4347,1570 4347,1245 4297,1195 U1_1.12@4248,1195
ADC1_D4: U1_1.13 XC6SLX9-144.131 | length 2920.2
  Top Layer w10: XC6SLX9-144.131@2838.58,2889.65 2838.58,1917.42 3074,1682 4192,1682 4280,1594 4280,1442 4170,1332 U1_1.13@4170,1275 U1_1.13@4170,1267
ADC1_D5: U1_1.16 XC6SLX9-144.127 | length 2844.2
  Top Layer w10: XC6SLX9-144.127@2759.84,2889.65 2759.84,1728.16 2886,1602 4020,1602 4110,1512 U1_1.16@4110,1275 U1_1.16@4110,1269
ADC1_D6: U1_1.17 XC6SLX9-144.126 | length 2843.9
  Top Layer w10: XC6SLX9-144.126@2740.16,2889.65 2740.16,1712.84 2877,1576 4009,1576 4090,1495 U1_1.17@4090,1275 U1_1.17@4090,1268
ADC1_D7: U1_1.18 XC6SLX9-144.124 | length 2852.9
  Top Layer w10: XC6SLX9-144.124@2700.79,2889.65 2700.79,1718.21 2870,1549 4002,1549 4070,1481 U1_1.18@4070,1275 U1_1.18@4070,1267
ADC1_D8: U1_1.19 XC6SLX9-144.123 | length 2845.2
  Top Layer w10: XC6SLX9-144.123@2681,2893 2681,1707 2867,1521 3994,1521 4050,1465 U1_1.19@4050,1275
ADC1_D9: U1_1.20 XC6SLX9-144.121 | length 2858.9
  Top Layer w10: XC6SLX9-144.121@2641.73,2889.65 2641.73,1711.27 2857,1496 3984,1496 4030,1450 U1_1.20@4030,1275 U1_1.20@4030,1266
ADC1_D10: U1_1.21 XC6SLX9-144.120 | length 2850
  Top Layer w10: XC6SLX9-144.120@2622,2894 2622,1701 2852,1471 3972,1471 4010,1433 U1_1.21@4010,1275
ADC1_D11: U1_1.24 XC6SLX9-144.119 | length 2760.9
  Top Layer w10: XC6SLX9-144.119@2602.36,2889.65 2602.36,1689.64 2902,1390 3887,1390 3950,1327 U1_1.24@3950,1275 U1_1.24@3950,1264
ADC1_D12: U1_1.25 XC6SLX9-144.118 | length 2701.1
  Top Layer w10: XC6SLX9-144.118@2582.68,2889.65 2582.68,1681.32 2955,1309 3679,1309 3793,1195 U1_1.25@3870,1195 U1_1.25@3874,1195
ADC1_D13: U1_1.26 XC6SLX9-144.117 | length 2735.3
  Top Layer w10: XC6SLX9-144.117@2562.99,2889.65 2562.99,1669.01 2950,1282 3674,1282 3781,1175 U1_1.26@3870,1175 U1_1.26@3873,1175
ADC1_D14: U1_1.27 XC6SLX9-144.116 | length 2774
  Top Layer w10: XC6SLX9-144.116@2543.31,2889.65 2543.31,1655.69 2945,1254 3667,1254 3766,1155 U1_1.27@3870,1155 U1_1.27@3876,1155
ADC1_OTR: U1_1.28 XC6SLX9-144.115 | length 2803.8
  Top Layer w10: XC6SLX9-144.115@2523.62,2889.65 2523.62,1642.38 2938,1228 3664,1228 3757,1135 U1_1.28@3870,1135
ADC2_CLK: C61_2.1 R11_2.2 XC6SLX9-144.138 | length 2600.4
  Top Layer w10: XC6SLX9-144.138@2976.38,2889.65 2976.38,2651.62 v1@3059,2569 ; v1@3061,1892 3168,1785 4405,1785 4446,1826 R11_2.2@4446,1874.76 ; R11_2.2@4445.75,1874.76 R11_2.2@4446,1874.76 ; C61_2.1@4520.24,1874.76 R11_2.2@4446,1874.76
  Bottom Layer w10: v1(3057,1894) v1(3057,2570)
ADC2_D1: U1_2.10 XC6SLX9-144.11 | length 1856.7
  Top Layer w10: XC6SLX9-144.11@3165.35,3157.36 3803.64,3157.36 3953,3008 4226,3008 4404,2830 4404,2536 4333,2465 U1_2.10@4245,2465
ADC2_D2: U1_2.11 XC6SLX9-144.10 | length 1766.6
  Top Layer w10: XC6SLX9-144.10@3165.35,3137.68 3790.32,3137.68 3946,2982 4217,2982 4370,2829 4370,2536 4319,2485 U1_2.11@4250,2485
ADC2_D3: U1_2.12 XC6SLX9-144.9 | length 1692.6
  Top Layer w10: XC6SLX9-144.9@3165.35,3117.99 3776.01,3117.99 3935,2959 4206,2959 4339,2826 4339,2534 4310,2505 U1_2.12@4245,2505
ADC2_D4: U1_2.13 XC6SLX9-144.8 | length 1526.9
  Top Layer w10: XC6SLX9-144.8@3165.35,3098.31 3762.69,3098.31 3925,2936 4197,2936 4268,2865 4268,2740 4170,2642 U1_2.13@4170,2585 U1_2.13@4170,2578
ADC2_D5: U1_2.16 XC6SLX9-144.7 | length 1284.4
  Top Layer w10: XC6SLX9-144.7@3165.35,3078.62 3458.38,3078.62 3650,2887 4039,2887 4110,2816 U1_2.16@4110,2585
ADC2_D6: U1_2.17 XC6SLX9-144.6 | length 1251.8
  Top Layer w10: XC6SLX9-144.6@3165.35,3058.94 3446.06,3058.94 3641,2864 4031,2864 4090,2805 U1_2.17@4090,2585 U1_2.17@4090,2583
ADC2_D7: U1_2.18 XC6SLX9-144.5 | length 1217.9
  Top Layer w10: XC6SLX9-144.5@3162,3039 3435,3039 3633,2841 4022,2841 4070,2793 U1_2.18@4070,2585
ADC2_D8: U1_2.19 XC6SLX9-144.2 | length 1163.6
  Top Layer w10: XC6SLX9-144.2@3165.35,2980.2 3254.8,2980.2 3417,2818 4012,2818 4050,2780 U1_2.19@4050,2585 U1_2.19@4050,2584